# Altium PCB Panelized.PcbDoc
Units mil, origin at the board's own origin, x right, y up, seen from the top; angles counter-clockwise.
Board outline 1708.75 x 1945.38 mil, 4 copper layers (Top Layer, Mid Layer 1, Mid Layer 2, Bottom Layer), stack 61.811 mil thick; 79 components, 58 nets, 337 pads, 102 vias.
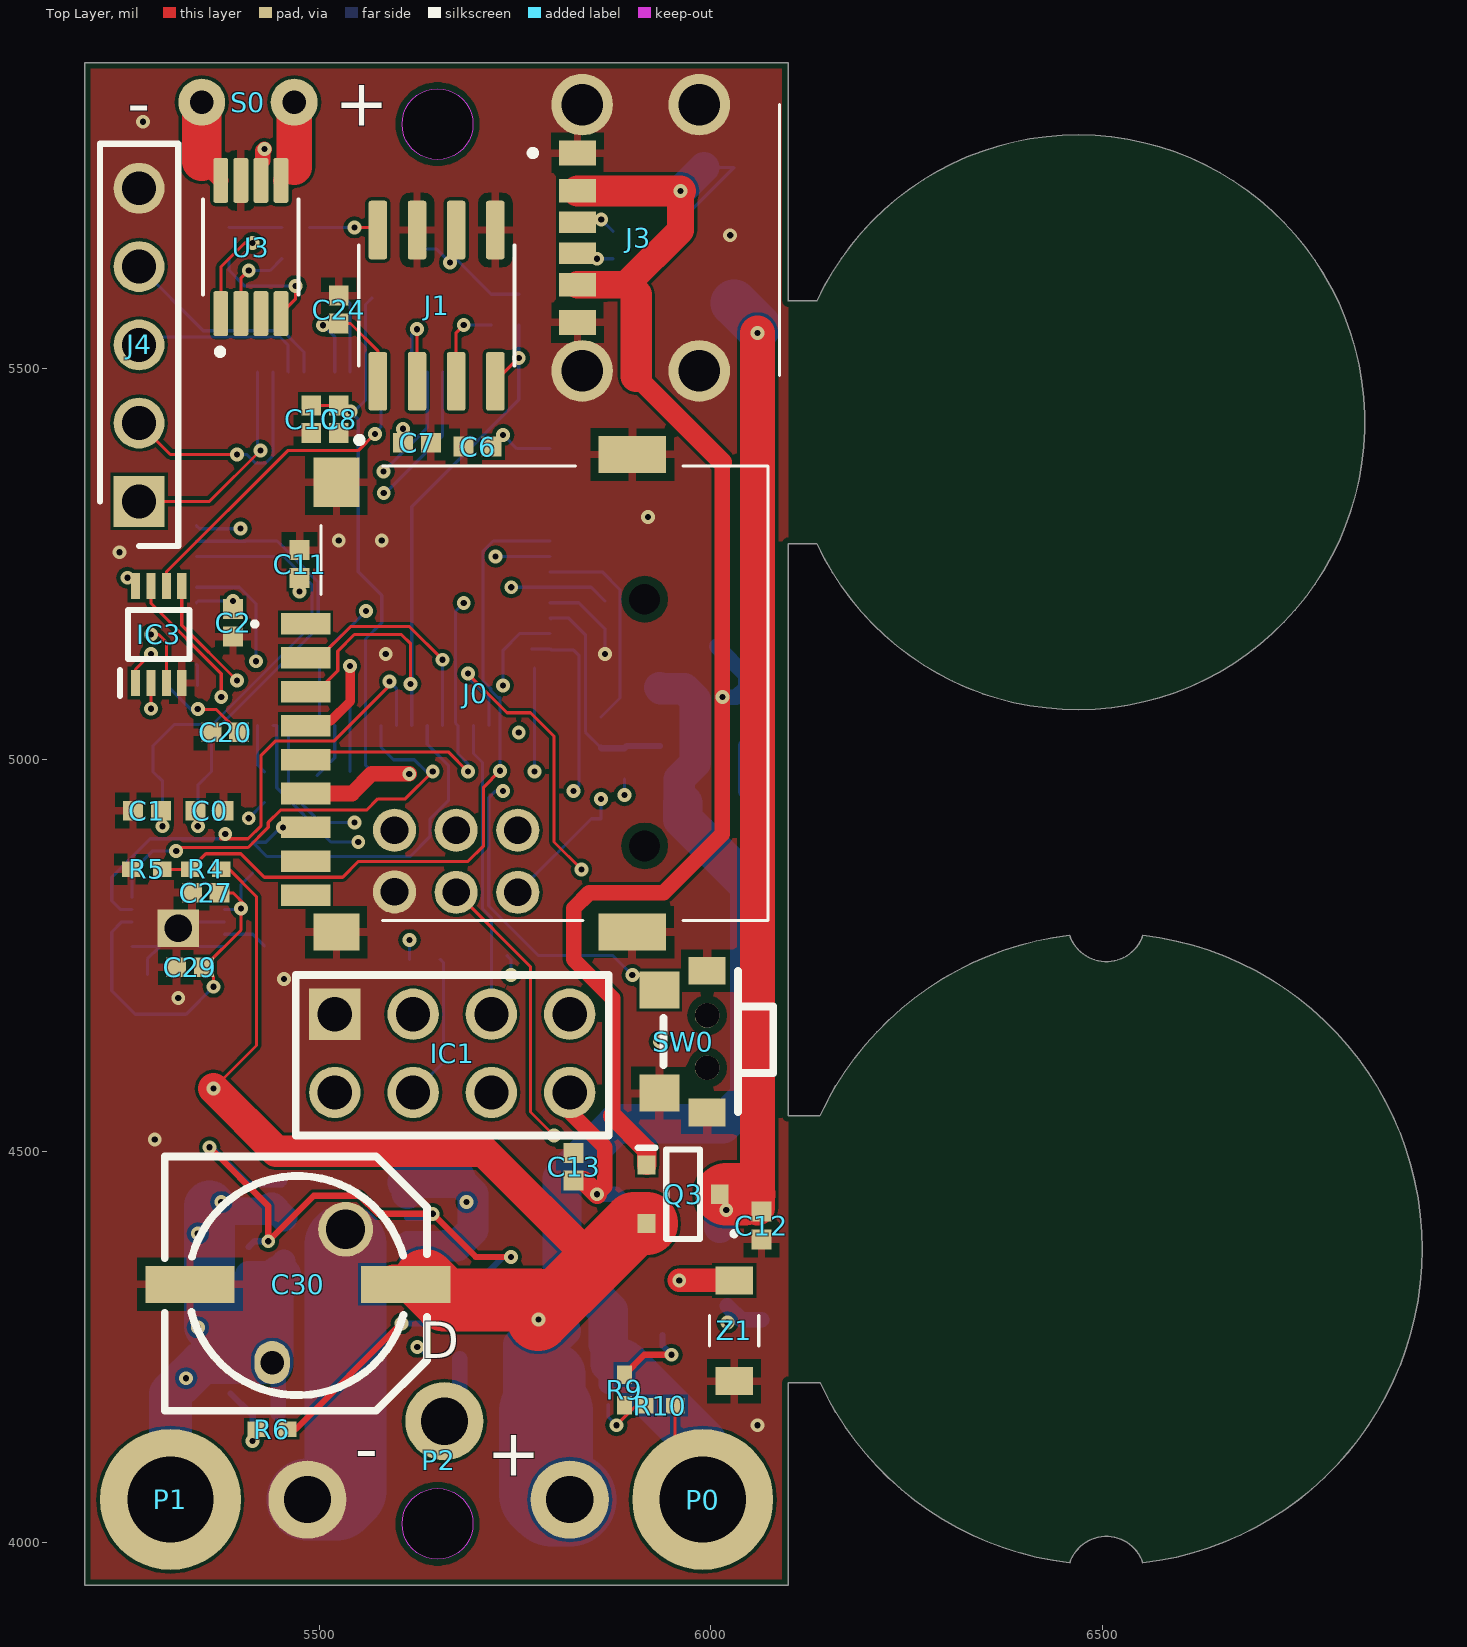
[diagram p0: Top Layer view]
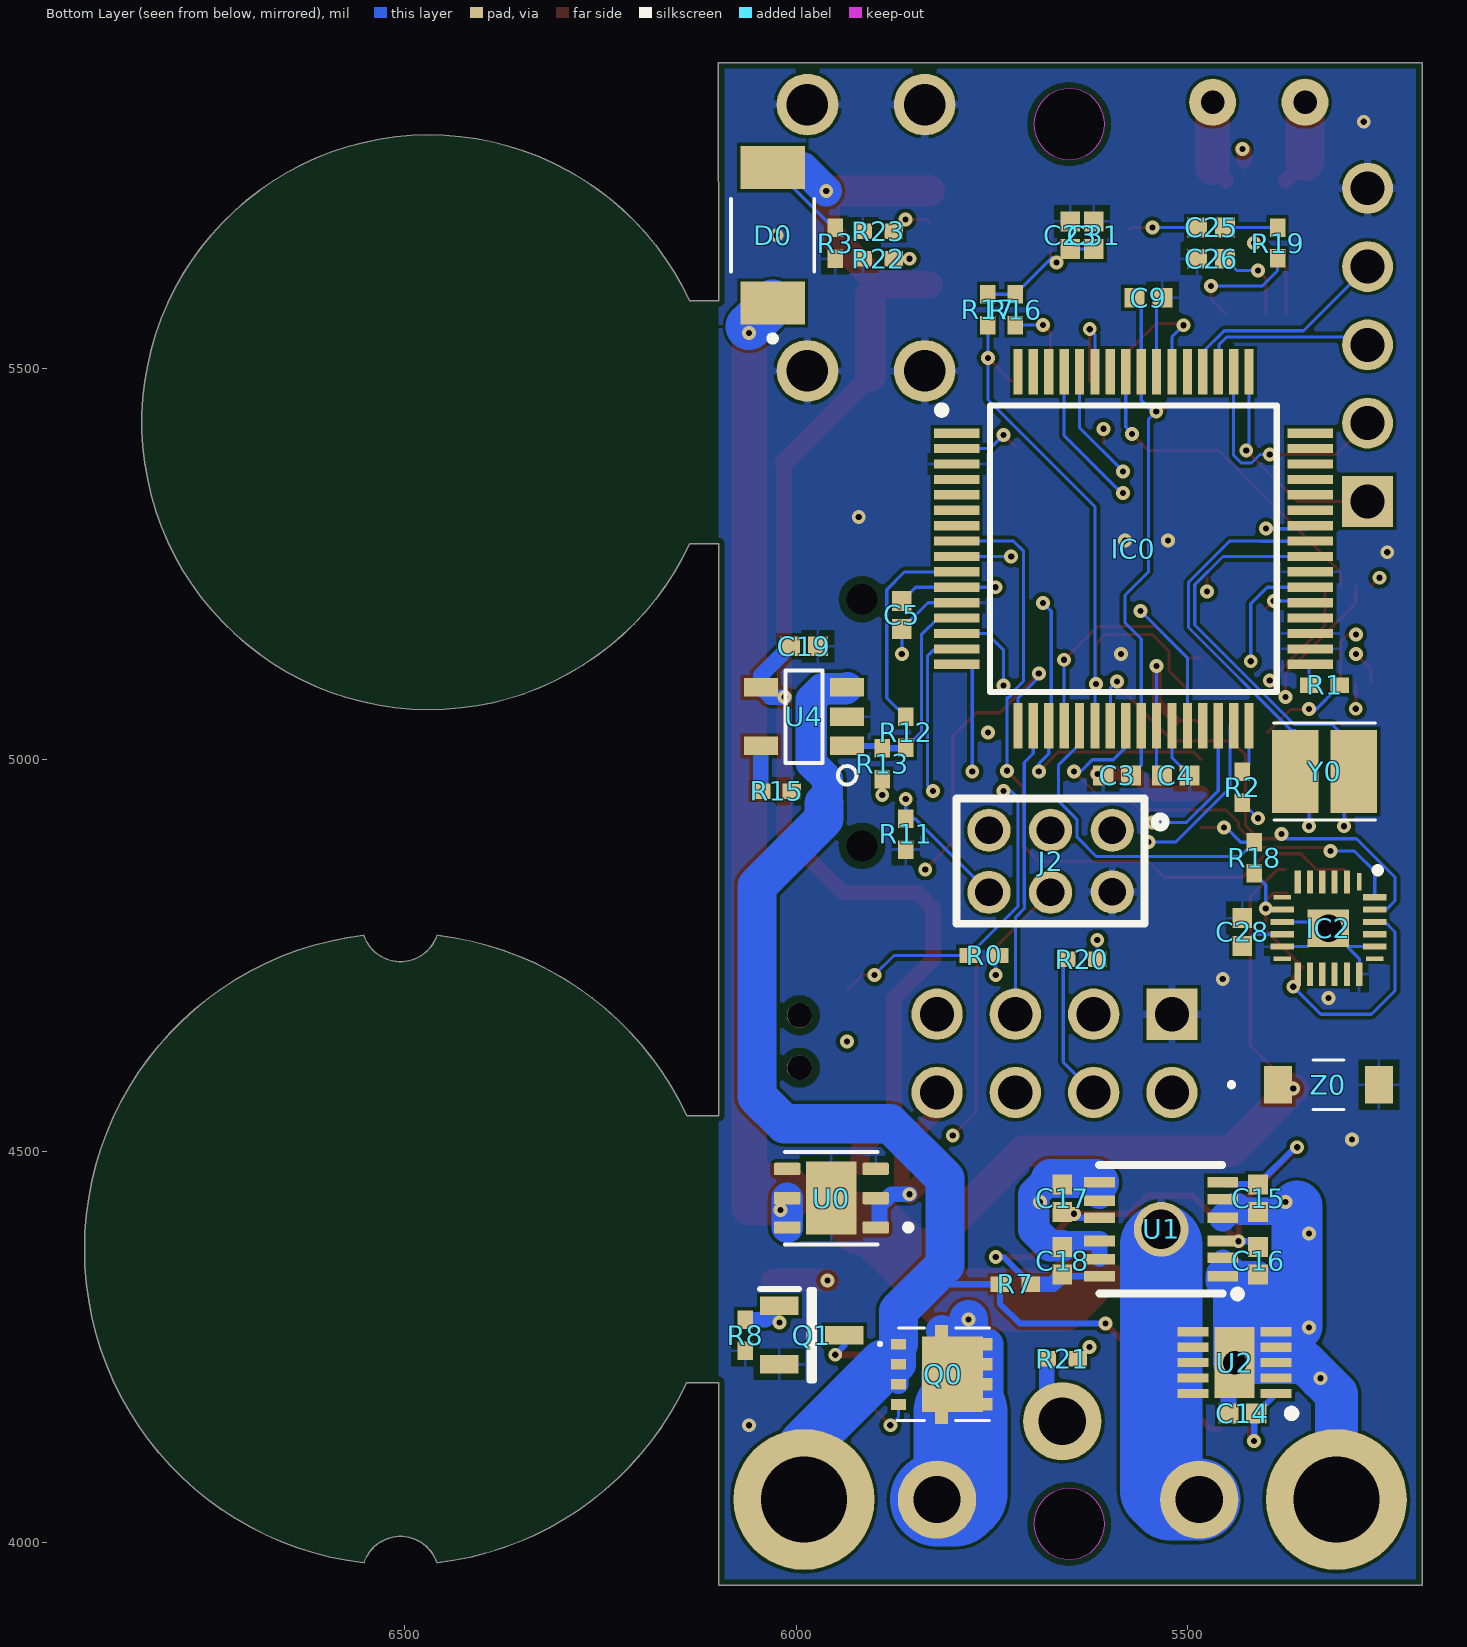
[diagram p1: Bottom Layer view, seen from below]
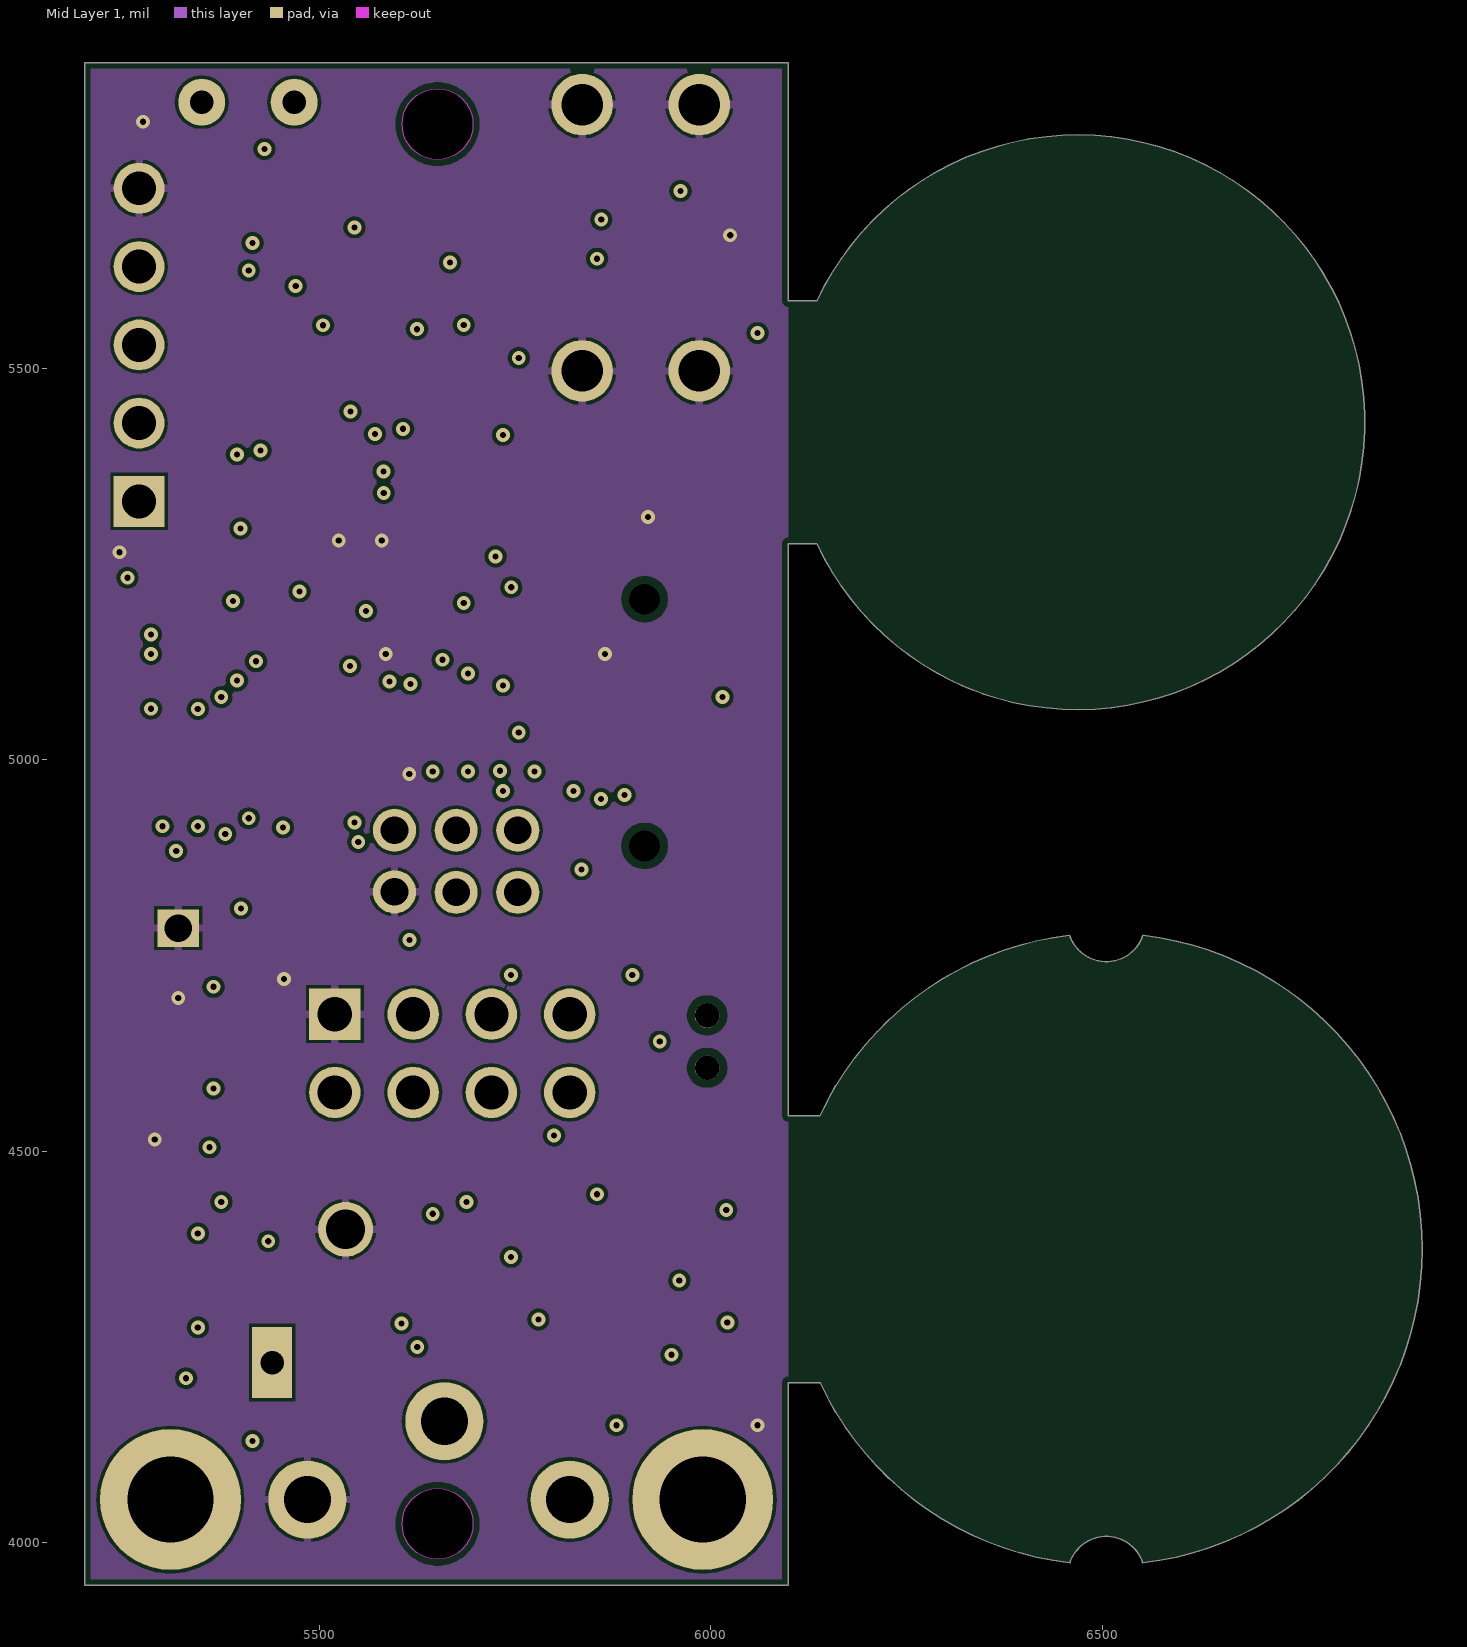
[diagram p2: Mid Layer 1]
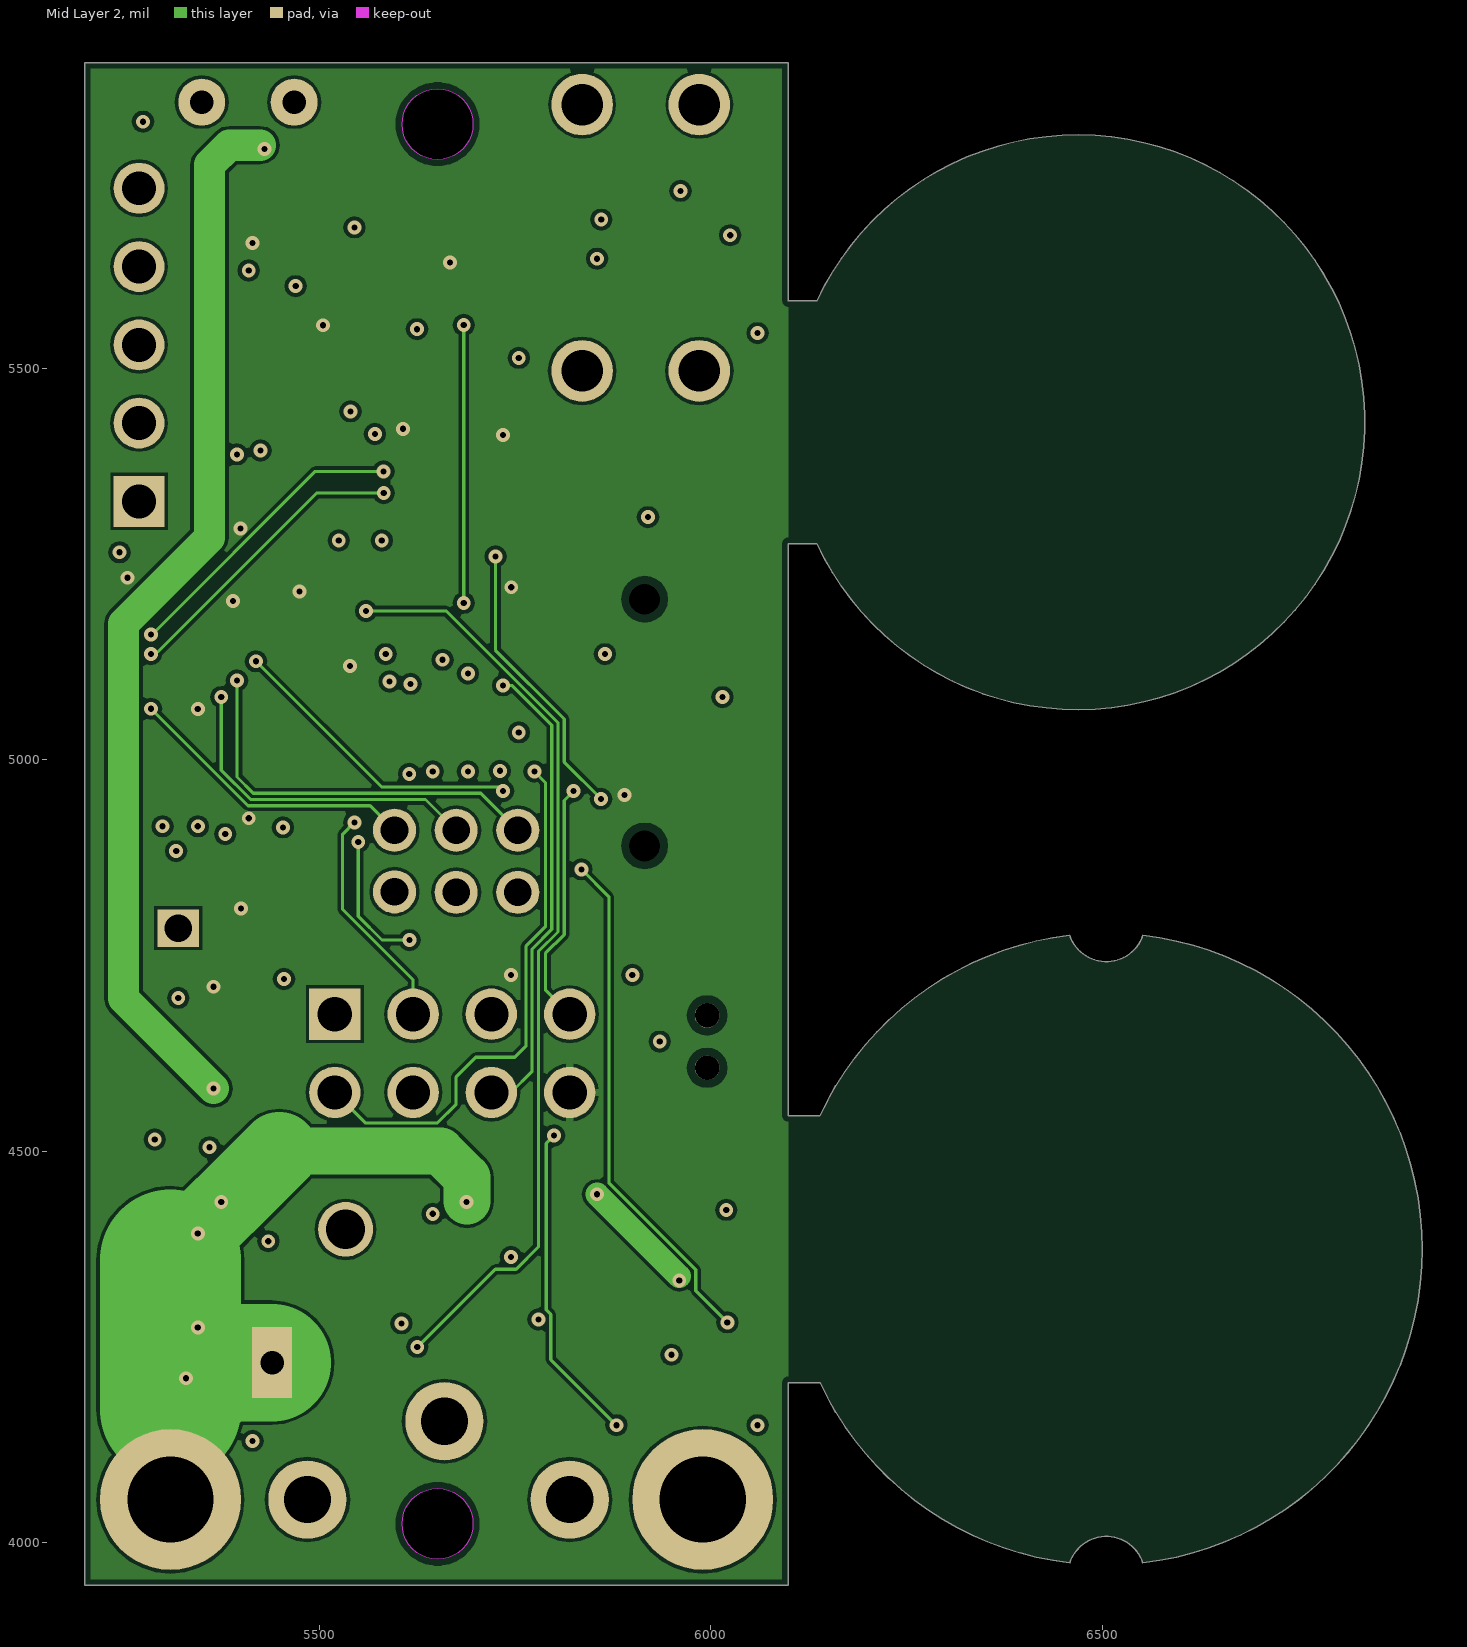
[diagram p3: Mid Layer 2]
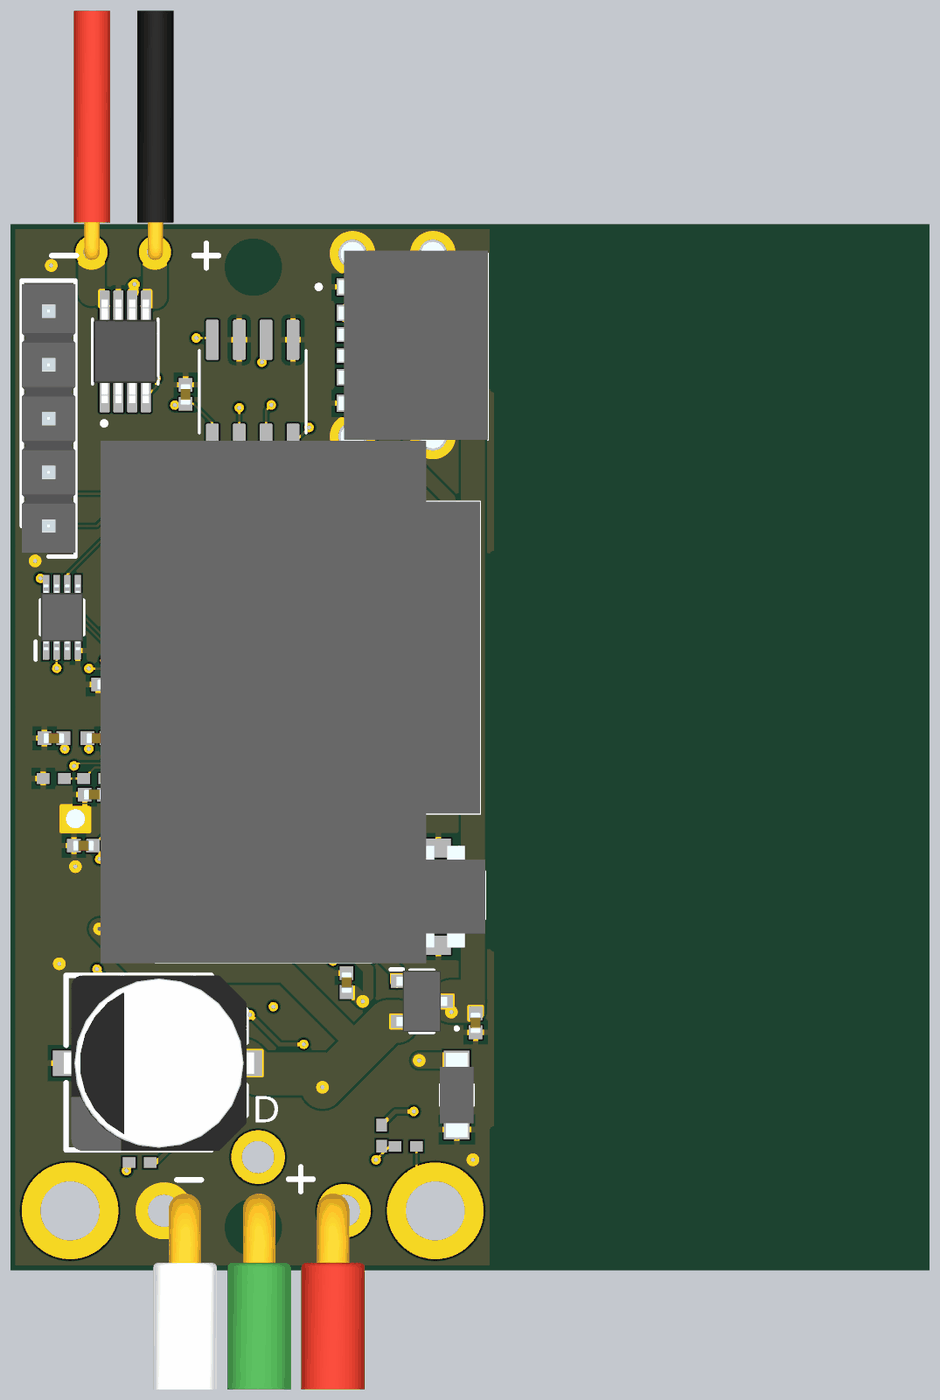
[diagram p4: 3D render of the assembled board from above, using the file's embedded part models]
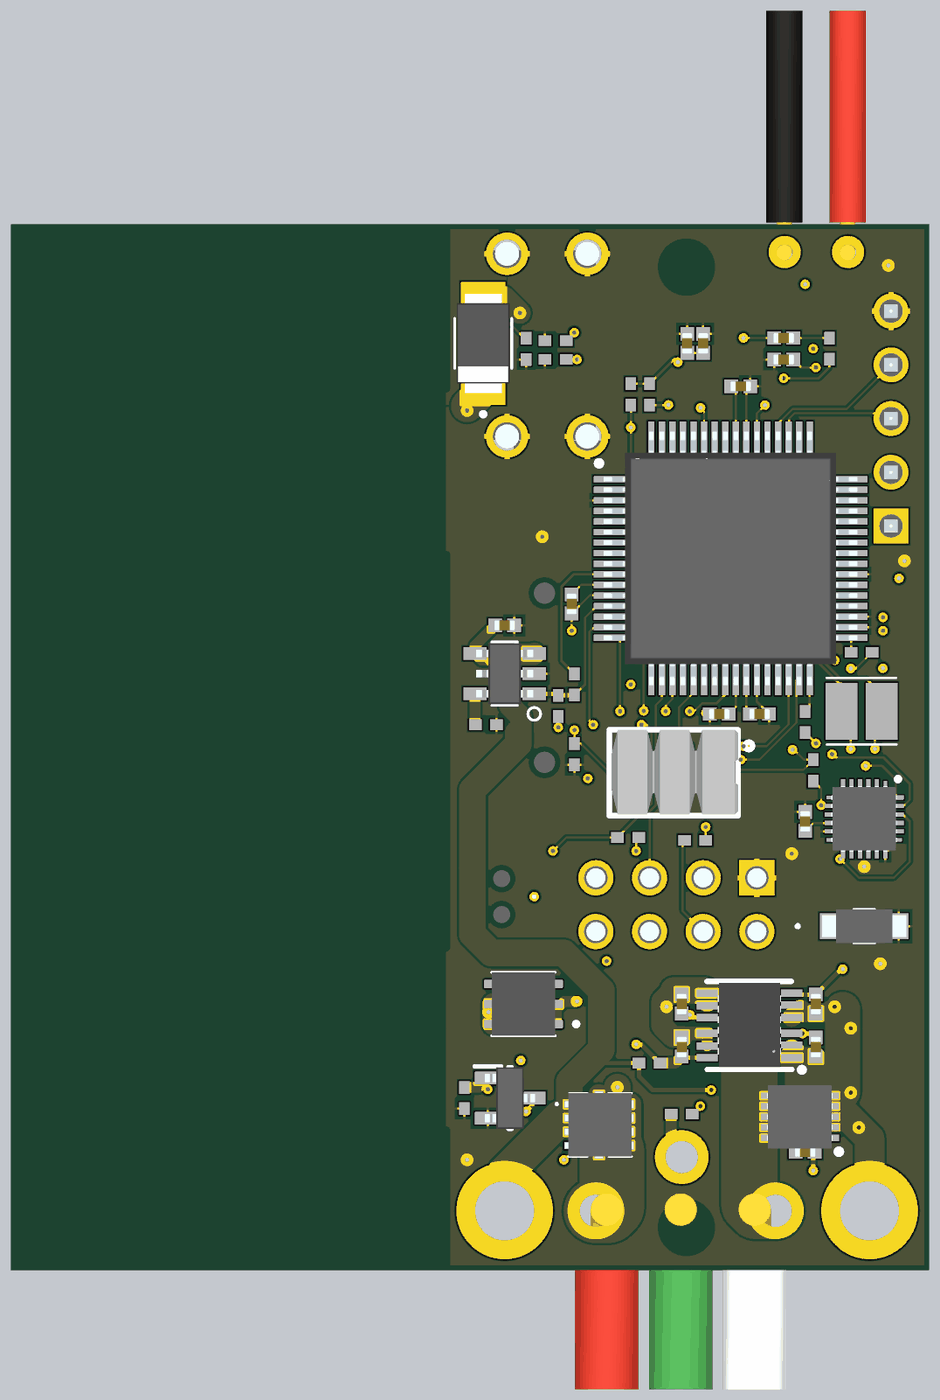
[diagram p5: 3D render of the assembled board from below, using the file's embedded part models]

## Layer stack, top to bottom
Top Solder: solder mask 0.5, Solder Resist, Dk 3.8
Top Layer: signal copper 1.378
Dielectric 1: prepreg 3.937, 2313, Dk 4.05
Mid Layer 1: signal copper 0.689
Core: core 49.8031, FR-4, Dk 4.5
Mid Layer 2: signal copper 0.689
Dielectric 2: prepreg 3.937, 2313, Dk 4.05
Bottom Layer: signal copper 1.378
Bottom Solder: solder mask 0.5, Solder Resist, Dk 3.8

## Board outline
6099.08,3945.25 6099.08,4204.42 6139.72,4204.42 ccw(c6505.45,4374.96) 6458.72,3974.13 cw(c6505.45,3958.7) 6552.18,3974.13 ccw(c6505.45,4374.96) 6552.18,4775.79 cw(c6505.45,4791.22) 6458.72,4775.79 ccw(c6505.45,4374.96) 6139.72,4545.51 6099.17,4545.51 6099.17,5275.91 6135.87,5275.91 ccw(c6468.6,5431.06) 6135.87,5586.22 6099.17,5586.22 6099.23,5890.63 6099.08,5890.63 5200.25,5890.63 5200.25,3945.25
cut-out: 5651.16,5766.61 cw(c5651.16,5811.89) 5605.89,5811.89 cw(c5651.16,5811.89) 5651.16,5857.16 cw(c5651.16,5811.89) 5696.44,5811.89 cw(c5651.16,5811.89)
cut-out: 5605.89,4023.99 cw(c5651.16,4023.99) 5651.16,4069.27 cw(c5651.16,4023.99) 5696.44,4023.99 cw(c5651.16,4023.99) 5651.16,3978.71 cw(c5651.16,4023.99)

## Design rules (kind name [scope] priority, off if disabled: settings)
BoardOutlineClearance [All] p1: gap=7.87 ignorepadtopadclearanceinfootprint=FALSE
Clearance [All] p1: gap=4 ignorepadtopadclearanceinfootprint=FALSE except(5: Arc-Via Track-Via SMDPad-Via THPad-Via Via-Via Via-Fill Via-Poly Via-Region Via-Text; 9.84: Arc-Hole Track-Hole SMDPad-Hole THPad-Hole Via-Hole Fill-Hole Poly-Hole Region-Hole Text-Hole)
ComponentClearance [All] p1: gap=4 collisioncheckmode=3 verticalgap=4 showdistances=TRUE
DiffPairsRouting [All] p1: maxlimit=4 minlimit=4 mostfreqgap=4 toplayer_minwidth=4 toplayer_maxwidth=71497.94 toplayer_prefwidth=4 midlayer1_minwidth=4 midlayer1_maxwidth=71497.94 midlayer1_prefwidth=4 midlayer2_minwidth=4 midlayer2_maxwidth=71497.94 midlayer2_prefwidth=4 bottomlayer_minwidth=4 bottomlayer_maxwidth=71497.94 bottomlayer_prefwidth=4 maxuncoupledlength=500
Height [All] p1: minheight=0 maxheight=71497.94 prefheight=500
HoleSize [All] p1: absolutevalues=TRUE maxlimit=248.03 minlimit=7.87 maxpercent=80.000 minpercent=20.000
HoleToHoleClearance [All] p1: gap=9.84 allowstackedmicrovias=FALSE
MinimumAnnularRing [All] p1: minimumring=3
MinimumSolderMaskSliver [All] p1: minsoldermaskwidth=0
PlaneClearance [All] p1: clearance=4
PlaneConnect PlaneConnectPowerPads [InPadClass('PowerPads')] p1: planeconnectstyle=Direct reliefexpansion=20 reliefentries=4 reliefconductorwidth=10 reliefairgap=10
PlaneConnect [All] p2: pad.planeconnectstyle=Relief pad.reliefexpansion=11.81 pad.reliefentries=4 pad.reliefconductorwidth=4 pad.reliefairgap=4 via.planeconnectstyle=Direct via.reliefexpansion=11.81 via.reliefentries=4 via.reliefconductorwidth=5 via.reliefairgap=5
PolygonConnect direct [All vs IsNamedPolygon('Top Layer-No Net1')] p1: thpad.connectstyle=Direct thpad.reliefconductorwidth=10 thpad.reliefentries=4 thpad.polygonreliefangle="90 Angle" thpad.airgapwidth=10 smdpad.connectstyle=Relief smdpad.reliefconductorwidth=10 smdpad.reliefentries=4 smdpad.polygonreliefangle="90 Angle" smdpad.airgapwidth=10 via.connectstyle=Direct via.reliefconductorwidth=10 via.reliefentries=4 via.polygonreliefangle="90 Angle" via.airgapwidth=10
PolygonConnect PolygonConnect_1 [All vs IsNamedPolygon('Top Layer-No Net1')] p2: thpad.connectstyle=Direct thpad.reliefconductorwidth=10 thpad.reliefentries=4 thpad.polygonreliefangle="90 Angle" thpad.airgapwidth=10 smdpad.connectstyle=Relief smdpad.reliefconductorwidth=10 smdpad.reliefentries=4 smdpad.polygonreliefangle="90 Angle" smdpad.airgapwidth=10 via.connectstyle=Direct via.reliefconductorwidth=10 via.reliefentries=4 via.polygonreliefangle="90 Angle" via.airgapwidth=10
PolygonConnect PolygonConnectPowerPads [All vs (InPadClass('PowerPads'))] p3: connectstyle=Direct reliefconductorwidth=10 reliefentries=4 polygonreliefangle="90 Angle" airgapwidth=10
PolygonConnect [All] p4: thpad.connectstyle=Relief thpad.reliefconductorwidth=10 thpad.reliefentries=4 thpad.polygonreliefangle="90 Angle" thpad.airgapwidth=4 smdpad.connectstyle=Relief smdpad.reliefconductorwidth=4 smdpad.reliefentries=4 smdpad.polygonreliefangle="90 Angle" smdpad.airgapwidth=8 via.connectstyle=Direct via.reliefconductorwidth=5 via.reliefentries=4 via.polygonreliefangle="90 Angle" via.airgapwidth=5
RoutingVias [All] p1: holewidth=7.87 width=17.72 viastyle="Through Hole" minholewidth=7.87 minwidth=17.72 maxholewidth=248.03 maxwidth=257.87
SilkToSilkClearance [All] p1: silktosilkclearance=0
SilkToSolderMaskClearance [IsPad] p1: minsilkscreentomaskgap=4 clearancetoexposedcopper=TRUE
SolderMaskExpansion [All] p1: expansion=2.95 istentingtop=FALSE
Width [All] p1: maxlimit=71497.94 minlimit=4 preferedwidth=4
20 further rules are at their usual default settings.

## Classes and differential pairs
component class Power: C12 C13 C14 C15 C16 C17 C18 C19 D0 J3 P0 P1 Q0 Q1 Q3 R3 R4 R5 R6 R7 R8 R9 R10 R11 R12 R13 R15 R22 R23 U0 U1 U2 U4 Z0 Z1
component class Peripherals: C20 C23 C24 C25 C26 C27 C28 C29 C30 IC1 IC2 IC3 J0 J1 J2 P2 R16 R17 R18 R19 R20 R21 S0 U3
component class Microcontroller: C0 C1 C2 C3 C4 C5 C6 C7 C8 C9 C10 C11 C31 IC0 J4 R0 R1 R2 SW0 Y0

## Components (designator, comment, footprint, x,y, rotation, side; value= is the part's Value field where it differs from the comment)
C0 "10pF 0402" CAPC1005X56N 5360,4935 r0 top
C1 "10pF 0402" CAPC1005X56N 5280,4935 r0 top
C2 "0.1uF 0402" CAPC1005X56N 5390,5175 r270 top
C3 "0.1uF 0402" CAPC1005X56N 5590,4980 r0 bottom
C4 "0.1uF 0402" CAPC1005X56N 5515,4980 r180 bottom
C5 "0.1uF 0402" CAPC1005X56N 5865,5185 r270 bottom
C6 "0.1uF 0402" CAPC1005X56N 5702.28,5400 r180 top
C7 "0.1uF 0402" CAPC1005X56N 5625,5405 r0 top
C8 "2.2uF 0402" CAPC1005X56N 5525,5435 r90 top
C9 "1uF 0402" CAPC1005X56N 5550,5590 r0 bottom
C10 "0.1uF 0402" CAPC1005X56N 5490,5435 r90 top
C11 "10uF 0402, Place in center of TM4C" CAPC1005X56N 5475,5250 r90 top
C12 "10uF 0402" CAPC1005X56N 6065,4405 r90 top
C13 "10uF 0402" CAPC1005X56N 5825,4480 r270 top
C14 "0.1uF 0402" CAPC1005X56N 5430,4165 r0 bottom
C15 "0.1uF 0402" CAPC1005X56N 5410,4440 r90 bottom
C16 "0.1uF 0402" CAPC1005X56N 5410,4360 r270 bottom
C17 "0.1uF 0402" CAPC1005X56N 5660,4440 r270 bottom
C18 "0.1uF 0402" CAPC1005X56N 5660,4360 r270 bottom
C19 "10uF 0402" CAPC1005X56N 5990,5145 r180 bottom
C20 "10uF 0402" CAPC1005X56N 5380,5035 r0 top
C23 "0.1uF 0402" CAPC1005X56N 5650,5670 r90 bottom
C24 "10uF 0402" CAPC1005X56N 5525,5575 r90 top
C25 "68nF 0402" CAPC1005X56N 5470,5680 r0 bottom
C26 "1uF 0402" CAPC1005X56N 5470,5640 r0 bottom
C27 "0.1uF 0402" CAPC1005X56N 5355,4830 r180 top
C28 "0.1uF 0402" CAPC1005X56N 5430,4780 r90 bottom
C29 "0.1uF 0402" CAPC1005X56N 5335,4735 r180 top
C30 "1000uF" "8x10.2mm Radial Capacitor" 5475.54,4330.02 r180 top
C31 "0.1uF 0402" CAPC1005X56N 5620,5670 r90 bottom
D0 "PMEG3050EP,115" SOD128 6030,5670 r90 bottom
IC0 "TM4C123GH6PMI7" QFP50P1200X1200X160-64N 5569.09,5269.53 r180 bottom
IC1 "ESP-01S" ESP-01 5520,4675 r0 top
IC2 "MPU-6500" QFN-24 5320,4785 r270 bottom
IC3 "SN74LVC3G17DCUR" SOP50P310X90-8N 5295,5160 r90 top
J0 "TF_PUSH" TFPUSH 5787.8,5084.88 r90 top
J1 "MCP4821-E/SN" SOIC127P600X175-8N 5650,5580 r90 top
J2 "PZ200V-12-06P" "2mm 2x3 Header TH" 5175,4370.63 r0 bottom
J3 "TYPE-C-31-M-17" TYPEC31M17 5928.43,5666.73 r90 top
J4 "0.1\" 1x5 Pins" HDRV5W64P0X254_1X5_1270X254X610P 5270,5330 r90 top
P0 "21700 Battery Pad" "21700 Battery Pad" 5990,4055 r0 top
P1 "21700 Battery Pad" "21700 Battery Pad" 5310,4055 r0 top
P2 "Neopixel" "Neopixel Pads" 5660,4055 r180 top
Q0 "AONR21357" AONR21357 5812.2,4215 r270 bottom
Q1 "L2N7002SWT1G" SC-70 5980,4265 r180 bottom
Q3 "SSM3J328R,LF" SOT-23F 5965,4445 r0 top
R0 "10kΩ, 0402" 0402 5760,4750 r180 bottom
R1 "10kΩ, 0402" 0402 5325,5095 r180 bottom
R2 "10kΩ, 0402" 0402 5430,4965 r270 bottom
R3 "10kΩ, 0402" 0402 5950,5659.69 r270 bottom
R4 "10kΩ, 0402" 0402 5355,4860 r180 top
R5 "10kΩ, 0402" 0402 5279.69,4860 r180 top
R6 "470Ω, 0402" 0402 5439.69,4145 r0 top
R7 "100Ω, 0402" 0402 5720,4330 r180 bottom
R8 "10kΩ, 0402" 0402 6065,4265 r90 bottom
R9 "1kΩ, 0402" 0402 5890,4195 r270 top
R10 "10kΩ, 0402" 0402 5935,4175 r0 top
R11 "1kΩ, 0402" 0402 5860,4905 r90 bottom
R12 "2kΩ, 0402" 0402 5860,5035 r90 bottom
R13 "800kΩ, 0402" 0402 5890,4995 r270 bottom
R15 "1.25kΩ, 0402" 0402 6025,4960 r180 bottom
R16 "10kΩ, 0402" 0402 5720,5575 r90 bottom
R17 "10kΩ, 0402" 0402 5755,5575 r90 bottom
R18 "10kΩ, 0402" 0402 5415,4875 r270 bottom
R19 "475kΩ, 0402" 0402 5385,5660 r270 bottom
R20 "10kΩ, 0402" 0402 5635,4745 r0 bottom
R21 "470Ω, 0402" 0402 5660,4235 r180 bottom
R22 "1kΩ, 0402" 0402 5895,5640 r0 bottom
R23 "1kΩ, 0402" 0402 5895,5675 r180 bottom
S0 "Speaker" "SPEAKER PADS" 5350,5840 r0 top
SW0 "TS24CA" TS24CA 6000,4640 r0 top
U0 "LD39200PU33R" SON95P300X300X100-7N 5955,4440 r0 bottom
U1 "XB9241A" DFN4x4x0.55-12FC 5533.83,4400.94 r0 bottom
U2 "XB6206AE" DFN3X3-10 5440,4230 r0 bottom
U3 "LY8006ULT" MSOP-8 5412.8,5654.96 r90 top
U4 "BL4054B-42TPTRN" TSOT23-5 5990,5055 r90 bottom
Y0 "NX3225GB-16M-STD-CRA-2" NX3225GD-STD-CRA-3 5325,4985 r180 bottom
Z0 "BZT52C4V7" SOD-123 5320,4585 r180 bottom
Z1 "MM1W3V3" SOD-123 6030,4270.63 r270 top

## Footprints (in the part's own frame and the unit in brackets; to place one, negate y for a bottom-side part, rotate by r counter-clockwise, add the part's x,y. Pads: shape width x height; smd on the part's side, far side on the other; paste and mask are expansions set on the pad)
"2mm 2x3 Header TH" [mm]
  round 1.4 hole 0.9: 1(10.7,-13.7) 2(12.7,-13.7) 3(14.7,-13.7) 4(14.7,-11.684) 5(12.7,-11.684) 6(10.7,-11.7)
  silkscreen extent 8.97,-14.73 15.75,-10.67, body extent 9.65,-14.73 15.65,-10.73, height 5.52
"8x10.2mm Radial Capacitor" [mil]
  rect 114.2x47.2 smd: 1(-135.06,0.02) 2(140.54,0.02)
  silkscreen extent -162,-163 173,162, body extent -177,-163 177,163, height 244
0402 [mm] "Chip Capacitor, Body 1.0x0.5mm, IPC High Density"
  rect 0.6x0.5 smd: 1(-0.5,0) 2(0.5,0)
  body extent -0.55,-0.3 0.55,0.3, height 1.3
"21700 Battery Pad" [mil]
  round 180 hole 110: 1(0,0)
AONR21357 [mm]
  rect 0.35x0.5 smd: 1(-0.975,-1.45) 2(-0.325,-1.45) 3(0.325,-1.45) 4(0.975,-1.45)
  rect 0.4x0.3 smd: 5(0.975,1.45) 6(0.325,1.45) 7(-0.325,1.45) 8(-0.975,1.45)
  rect 2.45x1.98 smd: 9(0,0.31)
  rect 0.38x0.43 smd: 10(-1.415,-0.05) 11(1.415,-0.05)
  silkscreen extent -1.5,-2.1 1.5,1.5, body extent -1.57,-1.66 1.57,1.57, height 1
CAPC1005X56N [mm]
  rect 0.65x0.64 smd: 1(-0.45,0) 2(0.45,0)
  body extent -0.5,-0.25 0.5,0.25, height 0.56
DFN3X3-10 [mm]
  rect 1x0.3 smd: 1(-1.35,1) 2(-1.35,0.5) 3(-1.35,0) 4(-1.35,-0.5) 5(-1.35,-1) 6(1.35,-1) 7(1.35,-0.5) 8(1.35,0) 9(1.35,0.5) 10(1.35,1)
  rect 1.3x2.3 / inner rect 1.3x2.3 / far side oval 1.143x1.397 hole 0.762: EPAD(0,0)
  silkscreen extent -1.97,1.53 -1.72,1.77, body extent -1.55,-1.5 1.55,1.5, height 0.8
DFN4x4x0.55-12FC [mm]
  rect 1x0.35 smd: 1(-2.002,1.543) 2(-2.002,0.943) 3(-2.002,0.393) 4(-2.002,-0.357) 5(-2.002,-0.957) 6(-2.002,-1.507) 7(1.998,-1.507) 8(1.998,-0.907) 9(1.998,-0.357) 10(1.998,0.393) 11(1.998,0.993) 12(1.998,1.543)
  round 1.778 hole 1.27: EPAD(-0.002,0.018)
  silkscreen extent -2.59,-2.06 2.01,2.23, body extent -1.5,-1.99 3.68,1.99, height 0.99
ESP-01 [mm]
  rect 1.665x1.665 hole 1.11: 1(0,0)
  round 1.665 hole 1.11: 2(2.54,0) 3(5.08,0) 4(7.62,0) 5(0,-2.54) 6(2.54,-2.54) 7(5.08,-2.54) 8(7.62,-2.54)
  silkscreen extent -1.27,-3.94 8.89,1.27, body extent -3.89,-4.04 11.51,20.66, height 5.66
HDRV5W64P0X254_1X5_1270X254X610P [mm]
  rect 1.65x1.65 hole 1.1: 1(0,0)
  round 1.65 hole 1.1: 2(2.54,0) 3(5.08,0) 4(7.62,0) 5(10.16,0)
  silkscreen extent -1.45,-1.27 11.61,1.27, body extent -1.27,-1.27 11.43,1.27, height 6.1
MSOP-8 [mm]
  rrect25% 1.45x0.48 smd: 1(-2.16,0.975) 2(-2.16,0.325) 3(-2.16,-0.325) 4(-2.16,-0.975) 5(2.16,-0.975) 6(2.16,-0.325) 7(2.16,0.325) 8(2.16,0.975)
  silkscreen extent -3.5,-1.55 1.55,1.55, body extent -2.45,-1.5 2.45,1.5, height 1.03
"Neopixel Pads" [mm]
  round 2.54 hole 1.53: +(-4.064,0) -(4.445,0) D(0,-2.54)
  body extent -5.04,-0.82 4.95,8.44, height 3
NX3225GD-STD-CRA-3 [mm]
  rect 1.5x2.7 smd: 1(-0.95,0) 2(0.95,0)
  silkscreen extent -1.65,-1.57 1.66,1.58
QFN-24 [mm]
  rect 0.559x0.152 smd: 1(-1.5,1)
  rect 0.75x0.2 smd: 2(-1.5,0.6) 3(-1.5,0.2) 4(-1.5,-0.2) 5(-1.5,-0.6) 6(-1.5,-1) 13(1.5,-1) 14(1.5,-0.6) 15(1.5,-0.2) 16(1.5,0.2) 17(1.5,0.6) 18(1.5,1)
  rect 0.152x0.559 smd: 7(-1,-1.5) 12(1,-1.5) 19(1,1.5)
  rect 0.2x0.75 smd: 8(-0.6,-1.5) 9(-0.2,-1.5) 10(0.2,-1.5) 11(0.6,-1.5) 20(0.6,1.5) 21(0.2,1.5) 22(-0.2,1.5) 23(-0.6,1.5) 24(-1,1.5)
  rect 1.219x1.346 hole 0.889: 25(0,0)
  silkscreen extent -1.97,1.5 -1.78,1.7, body extent -1.55,-1.55 1.55,1.55, height 0.95
QFP50P1200X1200X160-64N [mm]
  rect 1.475x0.3 smd: 1(-5.738,3.75) 2(-5.738,3.25) 3(-5.738,2.75) 4(-5.738,2.25) 5(-5.738,1.75) 6(-5.738,1.25) 7(-5.738,0.75) 8(-5.738,0.25) 9(-5.738,-0.25) 10(-5.738,-0.75) 11(-5.738,-1.25) 12(-5.738,-1.75) 13(-5.738,-2.25) 14(-5.738,-2.75) 15(-5.738,-3.25) 16(-5.738,-3.75) 33(5.738,-3.75) 34(5.738,-3.25) 35(5.738,-2.75) 36(5.738,-2.25) 37(5.738,-1.75) 38(5.738,-1.25) 39(5.738,-0.75) 40(5.738,-0.25) 41(5.738,0.25) 42(5.738,0.75) 43(5.738,1.25) 44(5.738,1.75) 45(5.738,2.25) 46(5.738,2.75) 47(5.738,3.25) 48(5.738,3.75)
  rect 0.3x1.475 smd: 17(-3.75,-5.738) 18(-3.25,-5.738) 19(-2.75,-5.738) 20(-2.25,-5.738) 21(-1.75,-5.738) 22(-1.25,-5.738) 23(-0.75,-5.738) 24(-0.25,-5.738) 25(0.25,-5.738) 26(0.75,-5.738) 27(1.25,-5.738) 28(1.75,-5.738) 29(2.25,-5.738) 30(2.75,-5.738) 31(3.25,-5.738) 32(3.75,-5.738) 49(3.75,5.738) 50(3.25,5.738) 51(2.75,5.738) 52(2.25,5.738) 53(1.75,5.738) 54(1.25,5.738) 55(0.75,5.738) 56(0.25,5.738) 57(-0.25,5.738) 58(-0.75,5.738) 59(-1.25,5.738) 60(-1.75,5.738) 61(-2.25,5.738) 62(-2.75,5.738) 63(-3.25,5.738) 64(-3.75,5.738)
  silkscreen extent -6.35,-4.65 4.65,4.65, body extent -6,-6 6,6, height 1.6
SC-70 [mm]
  rect 1.25x0.6 smd: 1(-1.05,0.95) 2(-1.05,-0.95) 3(1.05,0)
  silkscreen extent -1.68,-1.46 0.08,1.5, body extent -1.18,-1.46 1.19,1.46, height 1.12
SOD128 [mm]
  rect 1.4x2.1 smd paste-2: 1(-2.2,0) 2(2.2,0)
  silkscreen extent -3.45,-1.35 1.18,1.35, body extent -2.35,-1.25 2.35,1.25, height 1.1
SOD-123 [mm]
  rect 0.91x1.22 smd: 1(-1.635,0) 2(1.635,0)
  silkscreen extent -3.2,-0.8 0.5,0.8, body extent -2,-0.8 2,0.8, height 1.4
SOIC127P600X175-8N [mm]
  rrect25% 1.9x0.6 smd: 1(-2.455,1.905) 2(-2.455,0.635) 3(-2.455,-0.635) 4(-2.455,-1.905) 5(2.455,-1.905) 6(2.455,-0.635) 7(2.455,0.635) 8(2.455,1.905)
  silkscreen extent -4.45,-2.52 1.95,2.6
SON95P300X300X100-7N [mm]
  rrect25% 0.86x0.4 smd: 1(-1.435,0.95) 2(-1.435,0) 3(-1.435,-0.95) 4(1.435,-0.95) 5(1.435,0) 6(1.435,0.95)
  rect 1.63x2.37 smd paste-2: 7(0,0)
  silkscreen extent -2.59,-1.5 1.5,1.5, body extent -1.5,-1.5 1.5,1.5, height 0.54
SOP50P310X90-8N [mm]
  rect 0.85x0.3 smd: 1(-1.575,0.75) 2(-1.575,0.25) 3(-1.575,-0.25) 4(-1.575,-0.75) 5(1.575,-0.75) 6(1.575,-0.25) 7(1.575,0.25) 8(1.575,0.75)
  silkscreen extent -2,-1 0.8,1.25, body extent -1.55,-1 1.55,1, height 0.9
SOT-23F [mm]
  rect 0.575x0.62 smd: 1(-1.188,0.95) 2(-1.188,-0.95) 3(1.188,0)
  silkscreen extent -1.48,-1.45 0.55,1.51, body extent -1.2,-1.45 1.2,1.45, height 0.88
"SPEAKER PADS" [mil]
  round 60 hole 30: +(118.11,0) -(0,0)
  body extent -32,-15 152,449, height 77
TFPUSH [mm]
  rect 0.7x1.6 smd: 1(2.25,7.75) 2(1.15,7.75) 3(0.05,7.75) 4(-1.05,7.75) 5(-2.15,7.75) 6(-3.25,7.75) 7(-4.35,7.75) 8(-5.45,7.75) CD1(-6.55,7.75)
  rect 1.6x1.5 smd: G1(6.85,6.75)
  rect 1.2x1.5 smd: G2(-7.75,6.75)
  rect 1.2x2.2 smd: G3(-7.75,-2.85) G4(7.75,-2.85)
  round 0.5 hole 1 unplated: MH1(3.05,-3.25) MH2(-4.95,-3.25)
  silkscreen extent -7.37,-7.25 7.37,9.45, body extent -8.23,-7.25 8.23,8.48, height 2.1
TS24CA [mm]
  rect 1.2x0.9 smd: 1(-0.114,2.3) 2(-0.114,-2.3)
  rect 1.3x1.2 smd: 3(-1.664,1.675) 4(-1.664,-1.675)
  round 0.8 hole 0.8 unplated paste+0 mask+0.102: ""(-0.114,-0.85) ""(-0.114,0.85)
  silkscreen extent -1.52,-2.29 2.03,2.29, body extent -1.9,-2.39 2.1,2.39, height 1.45
TSOT23-5 [mm]
  rect 0.6x1.1 smd: 1(-0.95,-1.4) 2(0,-1.4) 3(0.95,-1.4) 4(0.95,1.4) 5(-0.95,1.4)
  silkscreen extent -2.2,-1.7 1.5,0.6, body extent -1.45,-1.35 1.45,1.35, height 1.45
TYPEC31M17 [mm]
  rect 0.7x1.2 smd: A5(-0.5,2.5) B5(0.5,2.5)
  rect 0.76x1.2 smd: A9(1.52,2.5) B9(-1.52,2.5)
  rect 0.8x1.2 smd: A12(2.75,2.5) B12(-2.75,2.5)
  round 2 hole 1.346: MH1(-4.32,-1.45) MH2(4.32,-1.45) MH3(4.32,2.35) MH4(-4.32,2.35)
  silkscreen extent -4.47,-4.05 4.32,4.05, body extent -4.89,-4.05 4.89,3.03, height 3.36

## Part data
C0 C1 C2 C3 C4 C5 C6 C7 C8 C9 C10 C11 C12 C13 C14 C15 C16 C17 C18 C19 C20 C23 C24 C25 C26 C27 C28 C29 C31: library part 04025A100BAT2A, "Capacitor", Manufacturer_Name=AVX, Mouser Part Number=581-04025A100B, Arrow Part Number=04025A100BAT2A, Arrow Price/Stock=https://www.arrow.com/en/products/04025a100bat2a/avx, Datasheet Link=http://www.mouser.com/catalog/supplier/library/pdf/AVXSurfaceMountCeramic.pdf, Height=0.56mm, Manufacturer_Part_Number=04025A100BAT2A, Mouser Price/Stock=https://www.mouser.com/Search/Refine.aspx?Keyword=581-04025A100B
C30: library part "8x10.2mm Radial Capacitor", "Capacitor Polarised", Manufacturer_Name="Cinch Connectivity Solutions", Manufacturer_Part_Number=107CKS035M, Datasheet Link=http://www.farnell.com/datasheets/1912641.pdf, Height=12.5mm
D0: "Schottky Diode", Manufacturer_Name=Nexperia, Mouser Part Number=771-PMEG3050EP115, Arrow Part Number=PMEG3050EP,115, Arrow Price/Stock=https://www.arrow.com/en/products/pmeg3050ep115/nexperia, Datasheet Link=https://docs-emea.rs-online.com/webdocs/14cd/0900766b814cd012.pdf, Height=1mm, Manufacturer_Part_Number=PMEG3050EP,115, Mouser Price/Stock=https://www.mouser.co.uk/ProductDetail/Nexperia/PMEG3050EP115?qs=GcY6OjH1zdmnjQ%2FhUT5aOA%3D%3D
IC0: "Integrated Circuit", Manufacturer_Name="Texas Instruments", Mouser Part Number=595-TM4C123GH6PMI7, Arrow Part Number=TM4C123GH6PMI7, Arrow Price/Stock=https://www.arrow.com/en/products/tm4c123gh6pmi7/texas-instruments, Datasheet Link=http://www.ti.com/lit/gpn/tm4c123gh6pm, Height=1.6mm, Manufacturer_Part_Number=TM4C123GH6PMI7, Mouser Price/Stock=https://www.mouser.co.uk/ProductDetail/Texas-Instruments/TM4C123GH6PMI7?qs=m%2F7bTylgptcEEuXHNU46tA%3D%3D
IC1: "Integrated Circuit", Manufacturer_Name=Ai-Thinker, Manufacturer_Part_Number=ESP-01, Datasheet Link=http://wiki.ai-thinker.com/_media/esp8266/esp8266_series_modules_user_manual_v1.1.pdf, Height=2mm
IC2: "Integrated Circuit", Manufacturer_Name=TDK, Mouser Part Number=410-MPU-6500, Arrow Part Number=MPU-6500, Arrow Price/Stock=https://www.arrow.com/en/products/mpu-6500/invensense, Datasheet Link=https://www.invensense.com/wp-content/uploads/2015/02/MPU-6500-Datasheet2.pdf, Height=0.95mm, Manufacturer_Part_Number=MPU-6500
IC3: "Integrated Circuit", Manufacturer_Name="Texas Instruments", Mouser Part Number=595-SN74LVC3G17DCUR, Arrow Part Number=SN74LVC3G17DCUR, Arrow Price/Stock=https://www.arrow.com/en/products/sn74lvc3g17dcur/texas-instruments, Datasheet Link=http://www.ti.com/lit/ds/symlink/sn74lvc3g17.pdf, Height=0.9mm, Manufacturer_Part_Number=SN74LVC3G17DCUR, Mouser Price/Stock=https://www.mouser.co.uk/ProductDetail/Texas-Instruments/SN74LVC3G17DCUR?qs=0smPjiIwnfJ%2FZmnYCRa%2FdA%3D%3D
J0: "Connector", Manufacturer_Name="Shou Han", Manufacturer_Part_Number="TF PUSH", Datasheet Link=https://datasheet.lcsc.com/szlcsc/1912111437_SHOU-HAN-TF-PUSH_C393941.pdf, Height=2mm
J1: Package=None, Availability=Unavailable, MF="{'manufacturer': u'Microchip'}", MP=MCP4821-E/SN, Price=None
J2: "Connector", Arrow Part Number=54202-G08-03, Manufacturer_Name=Amphenol, Mouser Part Number=649-54202-G08-03, Arrow Price/Stock=https://www.arrow.com/en/products/54202-g08-03/amphenol-fci, Datasheet Link=https://cdn.amphenol-icc.com/media/wysiwyg/files/drawing/54202.pdf, Height=9.85mm, Manufacturer_Part_Number=54202-G08-03, Mouser Price/Stock=https://www.mouser.co.uk/ProductDetail/Amphenol-FCI/54202-G08-03?qs=GN3JspNYOhaVPFh0SDYuCQ%3D%3D
J3: "Connector", Manufacturer_Name="Korean Hroparts Elec", Datasheet Link=https://datasheet.lcsc.com/szlcsc/1903211732_Korean-Hroparts-Elec-TYPE-C-31-M-17_C283540.pdf, Height=3.26mm, Manufacturer_Part_Number=TYPE-C-31-M-17
J4: library part M20-9990546, "Connector", Manufacturer_Name=Harwin, Mouser Part Number=855-M20-9990546, Datasheet Link=http://docs-emea.rs-online.com/webdocs/0da6/0900766b80da602d.pdf, Height=6.1mm, Manufacturer_Part_Number=M20-9990546, Mouser Price/Stock=https://www.mouser.co.uk/ProductDetail/Harwin/M20-9990546?qs=ulE8k0yEMYY8EKyDN9ic6A%3D%3D
Q0: "MOSFET (P-Channel)", Manufacturer_Name="Alpha & Omega Semiconductors", Datasheet Link=https://datasheet.lcsc.com/szlcsc/1910101232_Alpha-Omega-Semicon-AOS-AONR21357_C431196.pdf, Height=0.9mm, Manufacturer_Part_Number=AONR21357
Q1: "MOSFET (N-Channel)", Arrow Part Number=2N7000, Manufacturer_Name="ON Semiconductor", Mouser Part Number=512-2N7000, Arrow Price/Stock=https://www.arrow.com/en/products/2n7000/on-semiconductor, Datasheet Link=http://www.onsemi.com/pub/Collateral/NDS7002A-D.PDF, Manufacturer_Part_Number=2N7000, Mouser Price/Stock=https://www.mouser.co.uk/ProductDetail/ON-Semiconductor/2N7000?qs=FOlmdCx%252BAA2o%2FKZOTk%2F3hg%3D%3D
Q3: "P-Channel 20V 9.4A (Ta) 2.4W (Ta) Surface Mount 6-MicroFET (2x2)", Package=None, Availability=Unavailable, MF="{'manufacturer': u'ON Semiconductor'}", MP=FDMA910PZ, Price=None
R0 R1 R2 R3 R4 R5 R6 R7 R8 R9 R10 R11 R12 R13 R15 R16 R17 R18 R19 R20 R21 R22 R23: library part "Resistor, 0402"
U0: "Linear Voltage Regulator IC 1 Output 2A 6-DFN (3x3)", Package=None, Availability=Unavailable, MF="{'manufacturer': u'STMicroelectronics'}", MP=LD39200PU33R, Price=None
Y0: "Crystal or Oscillator", Manufacturer_Name=NDK, Mouser Part Number=344-NX3225GB16MSTRA2, Datasheet Link=http://www.ndk.com/images/products/catalog/c_NX3225GB-STD-CRA-2_e.pdf, Manufacturer_Part_Number=NX3225GB-16M-STD-CRA-2, Mouser Price/Stock=https://www.mouser.co.uk/ProductDetail/NDK/NX3225GB-16M-STD-CRA-2?qs=w%2Fv1CP2dgqqz6Fo69dRGLg%3D%3D
Z0 Z1: "Zener Diode", Arrow Part Number=BZT52-B5V1J, Manufacturer_Name=Nexperia, Mouser Part Number=771-BZT52-B5V1J, Arrow Price/Stock=https://www.arrow.com/en/products/bzt52-b5v1j/nexperia, Datasheet Link=https://assets.nexperia.com/documents/data-sheet/BZT52-B_SER.pdf, Height=1.3mm, Manufacturer_Part_Number=BZT52-B5V1J, Mouser Price/Stock=https://www.mouser.co.uk/ProductDetail/Nexperia/BZT52-B5V1J/?qs=W0yvOO0ixfGU2vzMfcQu3g%3D%3D

## Via types
v1: diameter 17.72, hole 7.87, Top Layer to Bottom Layer, 92 vias
v2: diameter 17.72/17.72/17.72/17.72 (per signal layer), hole 7.87, Top Layer to Bottom Layer, 10 vias

## Nets (pads, with @x,y where several pads share a name; then routed paths per layer and width w, separated by ;. In a path a pad name is that pad's centre, name@x,y a point inside that pad or via, vN(x,y) a via of type N, cw(c..) or ccw(c..) an arc to the next point about the centre after c; other vN are vias at no path point)
+3.3V: C2.1 C4.1 C5.1 C6.1 C7.1 C11.1 C13.2 C20.2 C23.1 C24.1 C27.1 C29.1 C31.1 IC0.2 IC0.11 IC0.26 IC0.37 IC0.42 IC0.54 IC1.8 IC2.8 IC2.13 IC2.22 IC3.8 J0.4 J1.1 J1.6 R0.2 R1.2 R2.2 R13.2 R16.2 R17.2 R18.2 U0.1 U0.2 U3.1 Z1.1 | length 2316.6
  Top Layer w4: v1(5255,5232.48) IC3.8 ; v1(5345,5064.69) 5345.54,5064.14 5368.57,5064.14 C20.2 ; v1(5365,4710) 5365,4722.72 C29.1 5400.11,4782.4 v1(5400.11,4810.11) 5405,4815 5390,4830 C27.1 ; U3.1 5374.41,5629.41 5405,5660 v1(5415,5660) ; v1(5390,5202.72) C2.1@5400,5192.72 ; v1(5475,5215) C11.1 ; J0.4 5489.13,5050 5515,5050 ; v1(5505,5555) 5507.28,5557.28 C24.1 5540,5557.28 5575,5522.28 J1.1 ; C7.1 v1(5607.28,5422.72) ; v1(5667.28,5635) 5675,5642.72 J1.6 ; C6.1 v1(5735,5415) ; IC1.8@5820,4550 IC1.8 ; C13.2 5837.72,4462.28
  Top Layer w12: 5515,5050 5539.57,5074.57 v1(5539.57,5119.57)
  Top Layer w20: IC1.8@5820,4550 5865,4505 5865,4455 v1(5855,4445)
  Top Layer w25: 5837.72,4462.28 v1(5855,4445)
  Top Layer w30: v1(5960,4335) Z1.1
  Mid Layer 2 w20: v1(5960,4335) v1@5960,4340
  Mid Layer 2 w30: v1(5855,4445) v1@5960,4340
  Bottom Layer w4: IC2.22 5247.87,4792.87 5235,4780 5235,4705 5265,4675 5330,4675 v1(5365,4710) ; R1.2 5340.31,5060 v1(5345,5064.69) ; IC0.37 5345.28,5202.72 v1(5390,5202.72) ; IC0.42 5347.09,5295.15 5372.42,5295.15 5372.57,5295 5399.26,5295 v1(5399.63,5295.37) ; IC2.8 5398.62,4808.62 v1(5400.11,4810.11) 5400.11,4840.43 R18.2 ; v1(5410,4925.31) R2.2 ; v1(5505,5555) 5519.88,5540.12 IC0.54 ; C4.1@5539.57,4985 IC0.26 v1(5539.57,5119.57) ; C31.1 C23.1 v1(5667.28,5635) ; v1@5673.48,5641.2 R16.2 R17.2 ; v1(5735,5415) 5752.52,5397.48 IC0.2 ; R0.2 5740,4749.69 5745,4744.69 v1(5745,4725) ; v1(5745.31,5220.31) IC0.11 5847.4,5220.31 C5.1 ; v1(5890,4955) R13.2
  Bottom Layer w20: v1(5855,4445) 5878.5,4445 5893.5,4430 5893.5,4412.6
+5V: C19.1 D0.2 J3.A9 J3.B9 Q3.1 R3.1 U4.4 | length 1984.8
  Top Layer w20: 5875,4545 5875,4695 5825,4745 5825,4810 5845,4830 5940,4830 6015,4905 v1(6015,5080) 6015,5380 ; 5891.89,5606.89 5905,5593.78
  Top Layer w25: 5875,4545 5918.23,4501.77 Q3.1 ; 5905,5490 6015,5380
  Top Layer w35: J3.B9 5890,5606.89 ; 5891.89,5606.89 5961.57,5676.57 v1(5961.57,5726.57)
  Top Layer w40: J3.A9 v1(5961.57,5726.57) ; 5905,5490 5905,5593.78
  Bottom Layer w4: R3.1 5952.76,5679.37 D0.2 D0.2@5991.61,5756.61
  Bottom Layer w20: C19.1 6045.12,5107.6 U4.4 6032.72,5080 v1(6015,5080)
  Bottom Layer w40: v1(5961.57,5726.57) D0.2@5991.61,5756.61
"Amplifier IN": C25.2 J1.8 | length 88.7
  Top Layer w4: v1(5545,5680) 5571.65,5680 J1.8
  Bottom Layer w4: C25.2 v1(5545,5680)
"Bat VDD": C15.2 C16.1 C17.2 C18.2 R7.2 U1.3 U1.6 U1.9 U1.12 | length 848.8
  Top Layer w8: v1(5360,4505) 5435,4430 v1(5435,4385) 5493.24,4443.24 5551.55,4443.24 5574.79,4420 v1(5645,4420) 5700,4365 v1(5745,4365)
  Bottom Layer w8: v1(5360,4505) 5362.72,4505 C15.2 5452.44,4457.72 U1.6 ; C16.1 5417.28,4385 v1(5435,4385) ; U1.12 5657.91,4340.2 C18.2 ; U1.9 5640,4415 v1(5645,4420) ; R7.2 5735.31,4365 v1(5745,4365)
  Bottom Layer w20: C18.2 5672.28,4330 R7.2
Bat+: P0.1 Q0.1 Q0.2 Q0.3 R6.2 R7.1 R10.2 U4.3 | length 2069.3
  Top Layer w4: P0.1@5954.69,4090.31 R10.2
  Top Layer w8: R6.2 5470,4145 v1(5605,4280)
  Top Layer w65: P0.1@5954.69,4090.31 P0.1
  Bottom Layer w4: P0.1 P0.1@5990,4125
  Bottom Layer w8: v1(5605,4280) 5714.37,4280 5739.69,4305.31 R7.1 5810,4330 5869.29,4270.71
  Bottom Layer w25: Q0.3 Q0.2
  Bottom Layer w40: U4.3 5936.47,5090.81 5966.48,5090.81 5980.54,5076.75 5980.54,4995.85 5960,4975.31 5960,4949.72 5965.28,4944.44
  Bottom Layer w45: Q0.1 Q0.2 5887.2,4227.8
  Bottom Layer w50: Q0.1 5869.29,4270.71 5869.29,4295.71 5810,4355 5810,4465 5880,4535 6015,4535 6050,4570 6050,4838.63 5964.5,4924.13 5964.5,4944.44
  Bottom Layer w65: 5887.2,4227.8 P0.1@5990,4125
Bat-: C14.2 C15.1 C16.2 C17.1 C18.1 P1.1 U1.1 U1.2 U1.4 U1.5 U1.7 U1.8 U1.10 U1.11 U2.2 U2.3 U2.4 U2.5 U2.EPAD | length 2098.6
  Mid Layer 2 w40: P1.1 5310,4170
  Mid Layer 2 w60: 5448.89,4500 5655,4500 5688.86,4466.14 v1@5688.86,4436.14
  Mid Layer 2 w100: 5310,4361.11 5448.89,4500
  Mid Layer 2 w150: 5310,4170 5370,4230 U2.EPAD
  Mid Layer 2 w180: 5310,4170 5310,4361.11
  Bottom Layer w4: U2.EPAD U2.EPAD@5447.72,4222.28
  Bottom Layer w20: C14.2 U2.EPAD@5447.72,4222.28 ; U1.11 U1.10
  Bottom Layer w25: U1.10 C18.1@5652.24,4385.47
  Bottom Layer w30: U1.1@5452.91,4342.28 U1.1 U1.2@5455,4359.58
  Bottom Layer w35: 5360,4276.54 U2.4 ; v1@5381.92,4430 5388.5,4423.42 5431.5,4423.42 5438.08,4430 5440,4430 U1.4 ; 5410,4272.83 C16.2 U1.1@5452.91,4342.28
  Bottom Layer w40: 5612.48,4445.89 U1.7 ; C18.1@5660,4379.08 5676.13,4379.08 5696.6,4399.55 5696.6,4445.02 5676.62,4465 5675,4465
  Bottom Layer w50: U2.3 U2.4 ; U1.7 5617.2,4465 5675,4465
  Bottom Layer w55: P1.1 5310,4190 v1(5330,4210) 5350,4230 U2.3 U2.EPAD 5440,4325.2 5449.74,4334.94 U1.1@5449.74,4340.2
  Bottom Layer w65: 5360,4276.54 5360,4430
  other v1: 5345,4275 5345,4395 5375,4435 5688.38,4435
"Button N/O A": J2.5 Q0.4 R9.2 R10.1 | length 850.6
  Top Layer w4: J2.5 5770,4735.63 5770,4550 v1(5800,4520) ; v1(5879.68,4150) 5904.69,4175 R10.1
  Mid Layer 2 w4: v1(5800,4520) 5790,4510 5790,4297.43 5795.86,4291.57 5795.86,4233.83 v1(5879.68,4150)
  Bottom Layer w4: Q0.4 5869.29,4160.39 v1(5879.68,4150)
"Button N/O B": IC0.9 J2.4 R11.2 | length 606
  Mid Layer 2 w4: v1(5725.31,5259.69) 5725.31,5140.31 5725,5140 5813,5052 5813,4997 v1(5860,4950)
  Bottom Layer w4: v1(5725.31,5259.69) IC0.9 ; J2.4 5847.8,4924.69 R11.2 v1(5860,4950)
"Charge Bias": IC0.10 R12.2 | length 271.3
  Bottom Layer w4: IC0.10 5861.6,5240 5884.22,5217.38 5884.22,5078.91 R12.2
"CS DAC": IC0.59 J1.2 | length 124
  Top Layer w4: J1.2 v1(5625,5550)
  Bottom Layer w4: IC0.59 5618.31,5543.31 v1(5625,5550)
"CS SD": IC0.20 J0.2 | length 293.1
  Top Layer w4: J0.2 5500.16,5130.16 5540,5170 5615.35,5170 v1(5657.68,5127.68)
  Bottom Layer w4: IC0.20 v1(5657.68,5127.68)
ESP_EN: IC0.31 R20.1 | length 414.5
  Mid Layer 2 w4: v1(5550,4895) 5550,4800 5580.31,4769.69 v1(5615.31,4769.69)
  Bottom Layer w4: IC0.31 5445.84,5043.62 5445.84,4964.16 5515,4895 v1(5550,4895) ; R20.1 v1(5615.31,4769.69)
ESP_IO0: IC0.18 IC1.3 | length 378.2
  Bottom Layer w4: IC0.18 5697.05,5007.95 5708.56,4996.44 5708.56,4816.73 5708.41,4816.58 5708.41,4809.96 5720,4798.37 IC1.3
ESP_IO2: IC0.30 IC1.2 | length 472.6
  Mid Layer 2 w4: v1(5545,4920) 5530,4905 5530,4808.69 5620,4718.69 IC1.2
  Bottom Layer w4: IC0.30 5460.83,4960.49 5501.31,4920 v1(5545,4920)
ESP_RST: IC0.14 IC1.7 | length 712.5
  Mid Layer 2 w4: IC1.7 5745,4575 5772,4602 5772,4758.31 5797,4783.31 5797,5044.11 5746.11,5095 v1(5735,5095)
  Bottom Layer w4: v1(5735,5095) 5735,5140 5756.26,5161.26 IC0.14
ESP_RX: IC0.15 IC1.4 | length 552.9
  Mid Layer 2 w4: IC1.4 5789,4706 5789,4752.69 5813,4776.69 5813,4948 v1(5825,4960)
  Bottom Layer w4: IC0.15@5771.26,5141.57 IC0.15 5796.57,5140 5825,5140 5832,5133 5832,4967 v1(5825,4960)
ESP_TX: IC0.16 IC1.5 | length 820.1
  Mid Layer 2 w4: IC1.5 5558.78,4536.22 5651.22,4536.22 5675,4560 5675,4595 5700,4620 5750,4620 5764,4634 5764,4761.63 5789,4786.63 5789,4971 v1(5775,4985)
  Bottom Layer w4: v1(5775,4985) IC0.16@5775,5116.89
GND: C0.2 C1.1 C2.2 C3.2 C4.2 C5.2 C6.2 C7.2 C8.1 C9.1 C10.1 C11.2 C12.1 C13.1 C19.2 C20.1 C23.2 C24.2 C26.2 C27.2 C28.2 C29.2 C30.2 C31.2 IC0.3 IC0.12 IC0.27 IC0.34 IC0.35 IC0.39 IC0.55 IC1.1 IC2.9 IC2.11 IC2.18 IC2.20 IC2.25 IC3.4 J0.6 J0.G1 J0.G2 J0.G3 J0.G4 J1.5 J1.7 J2.6 J3.A12 J3.B12 J3.MH1 J3.MH2 J3.MH3 J3.MH4 J4.5 P2.- Q1.2 R3.2 R5.2 R8.1 R11.1 R15.2 R22.2 R23.1 SW0.1 SW0.2 SW0.4 U0.3 U0.7 U1.EPAD U2.6 U2.7 U2.8 U2.9 U2.10 U3.7 U4.2 Z0.2 Z1.2 | length 1095.3
  Top Layer w20: J0.6 5541.93,4956.93 5567,4982 v1(5615,4982)
  Bottom Layer w4: IC2.20 5293.88,4761.38 IC2.25@5295.5,4763 ; IC2.18 5280.63,4745.63 5295.5,4760.5 IC2.25@5295.5,4763 ; IC2.11 5346.12,4761.38 5322.5,4785 IC2.25 ; IC2.9 5327.87,4792.87 IC2.25 ; C4.2 5497.48,4980 5508.08,4990.6 5508.08,4990.8 5519.88,5002.6 IC0.27 ; C9.1 5539.57,5582.72 IC0.55 ; IC0.12 5831.65,5200.63 C5.2 v2(5865,5135) ; IC2.25@5295.5,4763 5317.5,4785 IC2.25
  Bottom Layer w20: P2.-@5493.15,4084.06 P2.-@5522.2,4055
  Bottom Layer w40: U1.EPAD@5525,4391.5 U1.EPAD@5533.74,4380.24
  Bottom Layer w105: P2.- 5522.2,4055 5533.74,4066.53 5533.74,4252.42 5533.64,4252.51 5533.64,4300.04 5533.74,4300.14 U1.EPAD@5533.74,4380.24
  other v1: 5320,4695.86 5585,5135 5245,5265
  other v2: 6060,4150 5290,4515 5455,4720 5525,5280 5580,5280 5920,5310 6025,5670 5275,5815
"LED B": IC0.57 IC3.6 | length 439.7
  Top Layer w4: IC3.6 5304.84,5239.84 5459.81,5394.81 5549.81,5394.81 v1(5571.11,5416.12)
  Bottom Layer w4: v1(5571.11,5416.12) 5571.11,5417.49 5578.94,5425.32 IC0.57
"LED G": IC0.60 IC3.3 | length 609.9
  Top Layer w4: v1(5285,5160) 5295,5160 5304.84,5150.16 IC3.3
  Mid Layer 2 w4: v1(5285,5160) 5286.69,5160 5494.99,5368.3 v1(5582.31,5368.3)
  Bottom Layer w4: v1(5582.31,5368.3) 5637.99,5423.98 IC0.60
"LED R": IC0.61 IC3.1 | length 614.8
  Top Layer w4: IC3.1 5265.47,5115.47 v1(5285,5135)
  Mid Layer 2 w4: v1(5285,5135) 5287.62,5137.62 5293.6,5137.62 5496.53,5340.56 v1(5582.51,5340.56)
  Bottom Layer w4: v1(5582.51,5340.56) 5584.22,5340.56 5657.68,5414.02 IC0.61
MISO: IC0.21 J0.7 R18.1 | length 484.1
  Top Layer w4: v1(5453.62,4913.62) J0.7
  Bottom Layer w4: v1(5453.62,4913.62) 5452.24,4915 5431.93,4894.69 R18.1 5433.24,4876.44 5616.44,4876.44 5641.44,4901.44 5641.44,4923.9 5665,4947.46 5665,4992.87 5637.99,5019.88 IC0.21
MOSI: IC0.22 J0.3 J1.4 R17.1 | length 857.1
  Top Layer w4: J0.3 5496.85,5086.85 5523.71,5113.71 5523.71,5138.71 5545,5160 5605,5160 5616.85,5148.15 v1(5616.85,5096.85) ; J1.4 v1(5755,5513.35)
  Bottom Layer w4: v1(5616.85,5096.85) v1@5618.31,5088.31 ; IC0.22 v1@5618.31,5088.31 ; v1@5620,5090 v1@5618.31,5088.31 ; R17.1 v1(5755,5513.35) 5755,5460 5618.31,5323.31 v1@5618.31,5088.31
"Neopixel Data": IC0.28 R21.2 | length 1384.2
  Mid Layer 2 w4: v1(5560,5190) 5662.43,5190 5805,5047.43 5805,4780 5780,4755 5780,4377.57 5751.57,4349.14 5725.05,4349.14 5625.91,4250 v1(5625.31,4250)
  Bottom Layer w4: IC0.28 5500.2,5130.2 v1(5560,5190) ; v1(5625.31,4250) R21.2
NetC0_1: C0.1 IC0.41 Y0.1 | length 577
  Top Layer w4: C0.1 5342.28,4917.72 v1(5345,4915)
  Bottom Layer w4: IC0.41 5343.42,5279.14 5406.57,5279.14 5406.8,5279.37 5446.31,5279.37 5498.86,5226.83 5498.86,5168.86 5367,5037 5362.4,5037 Y0.1 5345,4967.6 v1(5345,4915)
NetC1_2: C1.2 IC0.40 Y0.2 | length 610
  Top Layer w4: C1.2 5297.72,4917.28 v1(5300,4915)
  Bottom Layer w4: v1(5300,4915) 5300,4972.6 Y0.2 5287.6,5017.6 5315,5045 5363.69,5045 5490.86,5172.17 5490.86,5223.51 5454.69,5259.69 IC0.40
NetC12_2: C12.2 D0.1 Q3.3 U0.5 U0.6 | length 1259.7
  Top Layer w4: 6042.72,4445 6060,4427.72 C12.2
  Top Layer w45: C12.2@6060,4427.72 v1(6060,5545)
  Top Layer w80: Q3.3@6020,4445 6042.72,4445
  Bottom Layer w4: v1(6060,5545) v1@6060,5553.39
  Bottom Layer w40: U0.6 U0.5
  Bottom Layer w60: D0.1 v1@6060,5553.39
  other v1: 6020,4425
NetC14_1: C14.1 R6.1 U2.1 | length 89.4
  Top Layer w8: v1(5415,4130) 5420,4135 R6.1
  Bottom Layer w8: U2.1 5386.85,4190.43 C14.1 5415,4162.28 v1(5415,4130)
NetC25_1: C25.1 R19.1 | length 67.4
  Bottom Layer w4: R19.1 5385.31,5680 C25.1
NetC26_1: C26.1 U3.2 | length 107.7
  Top Layer w4: U3.2 5400,5615 v1(5410,5625)
  Bottom Layer w4: v1(5410,5625) 5437.28,5625 C26.1
NetC28_1: C28.1 IC2.10 | length 57.1
  Bottom Layer w4: IC2.10 5415.16,4777.13 C28.1
NetIC0_32: IC0.32 R2.1 | length 62.5
  Bottom Layer w4: IC0.32 5421.46,4993.23 R2.1
NetIC0_33: IC0.33 R1.1 | length 27.5
  Bottom Layer w4: IC0.33 5344.69,5120.39 R1.1
NetIC1_6: IC1.6 R20.2 | length 187.8
  Bottom Layer w4: IC1.6 5658.78,4613.78 5658.78,4740.91 R20.2
NetIC3_2: IC3.2 J2.1 | length 408.2
  Top Layer w4: v1(5285.16,5065.16) IC3.2
  Mid Layer 2 w4: v1(5285.16,5065.16) 5409.14,4941.17 5565.09,4941.17 J2.1
NetIC3_5: IC3.5 J2.3 | length 660.1
  Top Layer w4: IC3.5 5324.53,5171.79 v1(5395,5101.31)
  Mid Layer 2 w4: v1(5395,5101.31) 5395,4977.94 5415.77,4957.17 5706.57,4957.17 J2.3
NetIC3_7: IC3.7 J2.2 | length 604.3
  Top Layer w4: IC3.7 5285.16,5199.84 5375,5110 v1(5375,5080)
  Mid Layer 2 w4: v1(5375,5080) 5375,4986.63 5412.46,4949.17 5635.83,4949.17 J2.2
NetJ3_A5: J3.A5 R22.1 | length 20.3
  Bottom Layer w4: v1(5855,5640) R22.1
NetJ3_B5: J3.B5 R23.2 | length 53
  Top Layer w4: J3.B5 5833.58,5690 v1(5860.31,5690)
  Bottom Layer w4: v1(5860.31,5690) R23.2
NetP2_D: P2.D R21.1 | length 88.2
  Bottom Layer w20: P2.D 5679.69,4174.69 R21.1
NetQ1_D: Q1.3 R9.1 | length 100.2
  Top Layer w8: R9.1 5915.32,4240 v1(5950,4240)
  Bottom Layer w8: Q1.3 5938.66,4251.34 v1(5950,4240)
NetR15_1: R15.1 U4.5 | length 57.8
  Bottom Layer w20: R15.1 6045.12,4960.43 U4.5
NetR19_2: R19.2 U3.4 | length 151.5
  Top Layer w4: U3.4 5470,5588.74 v1(5470,5605)
  Bottom Layer w4: R19.2 5385,5625 5405,5605 v1(5470,5605)
NetS0_+: S0.+ U3.5 | length 107
  Top Layer w20: U3.5 5468.11,5756.93
  Top Layer w45: 5468.11,5756.93 S0.+
NetS0_-: S0.- U3.8 | length 110.1
  Top Layer w20: 5350,5764.41 U3.8
  Top Layer w50: 5350,5764.41 S0.-
"Power ON": IC0.17 Q1.1 R8.2 | length 1133
  Top Layer w4: v1(5690,5110) 5740,5060 5770,5060 5800,5030 5800,4895 v1(5835,4860)
  Mid Layer 2 w4: v1(5835,4860) 5870,4825 5870,4459.7 5981,4348.7 5981,4321.68 v1(6021.34,4281.34)
  Bottom Layer w4: v1(5690,5110) 5690,5105 5716.73,5078.27 IC0.17 ; v1(6021.34,4281.34) Q1.1
  Bottom Layer w20: Q1.1 6039.06,4284.69 R8.2
SCK: IC0.19 J0.5 J1.3 R16.1 | length 914.3
  Top Layer w4: J0.5 5492.44,5010 5665,5010 v1(5690,4985) ; J1.3 5675,5545.63 v1(5684.69,5555.31)
  Mid Layer 2 w4: v1(5684.69,5200.31) v1(5684.69,5555.31)
  Bottom Layer w4: v1(5684.69,5200.31) 5674.14,5189.77 5674.14,5046.84 IC0.19 5677.36,5007.64 5690,4995 v1(5690,4985) ; v1(5684.69,5555.31) R16.1
SCL: IC0.23 IC2.23 | length 651.4
  Top Layer w4: v1(5380,4905) 5374.14,4899.14 5409.14,4899.14 5425.86,4915.86 5425.86,5005.86 5443.76,5023.76 5518.76,5023.76 5590,5095 v1(5590,5100)
  Bottom Layer w4: IC2.23 5246.38,4808.62 5235,4820 5235,4850 5284.14,4899.14 5306.57,4899.14 5318.29,4899.14 5374.14,4899.14 v1(5380,4905) ; v1(5590,5100) 5598.62,5091.38 IC0.23
SDA: IC0.24 IC2.24 | length 581.1
  Top Layer w4: v1@5317.34,4882.34 v1(5317.34,4883.28) 5322.06,4888 5409.31,4888 5435,4913.69 5435,4920 5450.86,4935.86 5560.86,4935.86 5575,4950 5610,4950 v1(5645,4985)
  Bottom Layer w4: IC2.24 5260.94,4857.51 5286.72,4883.28 v1(5317.34,4883.28) ; IC0.24 5578.94,5016.06 5595,5000 5621.6,5000 5636.6,4985 v1(5645,4985)
TCK: IC0.52 J4.4 | length 281.1
  Bottom Layer w4: J4.4 5352,5548 5453.31,5548 5480.51,5520.8 IC0.52
TDI: IC0.50 J4.2 | length 302.9
  Top Layer w4: J4.2 5310,5390 v1(5395,5390)
  Bottom Layer w4: v1(5395,5390) 5407.57,5390 5418.43,5379.14 5431.57,5379.14 5441.14,5388.71 IC0.50
TDO: IC0.49 J4.1 | length 283.8
  Top Layer w4: J4.1 5360,5330 v1(5425,5395)
  Bottom Layer w4: IC0.49 5421.46,5398.54 v1(5425,5395)
TMS: IC0.51 J4.3 | length 233.2
  Bottom Layer w4: J4.3 5280,5540 5450,5540 5460,5530 5460,5496.26 IC0.51
VBAT: C30.1 P2.+ Q0.5 Q0.6 Q0.7 Q0.8 Q0.9 Q0.10 Q0.11 Q3.2 R4.1 U3.6 Z0.1 | length 3113.1
  Top Layer w4: v1(5365,4580) 5420,4635 5420,4825 5385,4860 R4.1
  Top Layer w20: U3.6@5427.73,5765 5427.73,5777.73 v1(5430,5780)
  Top Layer w40: v1(5365,4580) 5445,4500 5710,4500 5852.5,4357.5 ; C30.1@5595.06,4334.98 C30.1@5634.98,4334.98
  Top Layer w70: v1(5780,4285) 5780,4310
  Top Layer w80: C30.1@5634.98,4334.98 5659.96,4310 5780,4310 ; v1(5780,4285) 5852.5,4357.5 5902.6,4407.6 Q3.2
  Mid Layer 2 w20: v1@5425,5785 v1(5430,5780)
  Mid Layer 2 w40: v1(5365,4580) 5250,4695 5250,5173.74 5360,5283.74 5360,5760 5385,5785 v1@5425,5785
  Bottom Layer w40: Q0.9 5761.61,4176.61 Q0.5 Q0.6 Q0.7 Q0.8 5780,4253.39 5796.85,4253.39 Q0.10
  Bottom Layer w50: Q0.9@5780,4253.39 v1(5780,4285)
  Bottom Layer w80: 5790,4166.61 5800,4176.61 Q0.9
  Bottom Layer w120: 5790,4166.61 5790,4062.8 5797.8,4055 P2.+
VDDC: C3.1 C8.2 C9.2 C10.2 IC0.25 IC0.56 | length 708.2
  Top Layer w4: C10.2 C8.2 5532.72,5445 v1(5540,5445)
  Bottom Layer w4: C9.2 5559.25,5581.54 IC0.56 5559.25,5459.25 5545,5445 v1(5540,5445) 5550,5435 5550,5240 5580,5210 5580,5175 5559.25,5154.25 IC0.25 5559.25,4993.03 C3.1
Vsense: IC0.8 R4.2 R5.1 | length 934.1
  Top Layer w4: R5.1 R4.2 5355.31,4880 5400,4880 5430,4850 5530,4850 5550,4870 5690,4870 5710,4890 5710,4965 v1(5730.86,4985.86)
  Bottom Layer w4: v1(5730.86,4985.86) 5730.86,5079.14 5728.43,5079.14 5719.14,5088.43 5719.14,5090.86 5709.46,5100.54 5709.46,5266.25 5722.57,5279.37 IC0.8
~Charging: IC0.13 R12.1 R13.1 U4.1 | length 284.1
  Bottom Layer w4: IC0.13@5795.94,5180 IC0.13 5818.74,5180.94 5840,5159.69 5840,5035.32 R12.1
  Bottom Layer w8: R12.1 5860.63,5014.69 R13.1 5892.91,5017.6 U4.1
~RST: IC0.38 R0.1 SW0.3 | length 965.5
  Top Layer w4: v1(5900,4725) 5915.43,4725 SW0.3
  Mid Layer 2 w4: v1(5419.26,5125.74) 5579.83,4965.17 5729.83,4965.17 v1(5735,4960)
  Bottom Layer w4: IC0.38 5398.2,5220.31 5419.26,5199.26 v1(5419.26,5125.74) ; v1(5735,4960) 5725,4960 5716.56,4951.56 5716.56,4813.42 5716.41,4813.27 R0.1 5875,4750 v1(5900,4725)
pads on no net: IC0.1 IC0.4 IC0.5 IC0.6 IC0.7 IC0.29 IC0.36 IC0.43 IC0.44 IC0.45 IC0.46 IC0.47 IC0.48 IC0.53 IC0.58 IC0.62 IC0.63 IC0.64 IC2.1 IC2.2 IC2.3 IC2.4 IC2.5 IC2.6 IC2.7 IC2.12 IC2.14 IC2.15 IC2.16 IC2.17 IC2.19 IC2.21 J0.1 J0.8 J0.CD1 J0.MH1 J0.MH2 SW0. U0.4 U3.3
copper on no net:
  other v1: 5755,5035
  other v2: 5935,4640

## Polygon pours and split planes (outlines as drawn)
GND on Mid Layer 1 "Top Layer-No Net" (solid, remove dead copper, pour order 8): 5200.25,3945.25 5200.25,5890.63 6099.08,5890.63 6099.08,3945.25
GND on Top Layer "Top Layer-No Net1" (solid, remove dead copper, pour order 9): 5200.25,3945.25 5200.25,5890.63 6099.08,5890.63 6099.08,3945.25
GND on Bottom Layer "Top Layer-No Net3" (solid, remove dead copper, pour order 11): 5200.25,3945.25 5200.25,5890.63 6099.08,5890.63 6099.08,3945.25
+3.3V on Mid Layer 2 "Top Layer-No Net2" (solid, remove dead copper, pour order 10): 5200.25,3945.25 5200.25,5890.63 6099.08,5890.63 6099.08,3945.25

## Other copper
Top Layer:
  pour cut-out: 5651.16,5766.61 cw(c5651.16,5811.89) 5605.89,5811.89 cw(c5651.16,5811.89) 5651.16,5857.16 cw(c5651.16,5811.89) 5696.44,5811.89 cw(c5651.16,5811.89)

## Silkscreen, mask and mechanical layers (free items; w line width, h text height)
Mechanical 1:
  circle w0.5: c5651.16,5811.89 r45.28
  circle w0.5: c5651.16,4023.99 r45.28
  lines w0.5: 6099.08,5890.63 5200.25,5890.63 5200.25,3945.25 6099.08,3945.25 6099.08,4204.42 6139.72,4204.42 ccw(c6505.45,4374.96) 6458.72,3974.13 cw(c6505.45,3958.7) 6552.18,3974.13 ccw(c6505.45,4374.96) 6552.18,4775.79 cw(c6505.45,4791.22) 6458.72,4775.79 ccw(c6505.45,4374.96) 6139.72,4545.51 6099.17,4545.51 6099.17,5275.91 6135.87,5275.91 ccw(c6468.6,5431.06) 6135.87,5586.22 6099.17,5586.22 6099.23,5890.63

## Panel: embedded boards
"..\Blade PCB\Blade-Side PCB.PcbDoc" at 6101.46,5063.94, 1 rows x 1 columns, spacing 2500 x 1500, rotation 0
"..\Hilt PCB\Hilt-Side PCB.PcbDoc" at 6101.9,3974.09, 1 rows x 1 columns, spacing 2500 x 1500, rotation 0

## Text inside footprints (layer, text, board x,y; h text height)
P2: Top Overlay "+" at 5783.29,4137.26 h60 r180; Top Overlay "-" at 5575.39,4136.12 h60 r180; Top Overlay "D" at 5630,4220 h80
S0: Top Overlay "+" at 5520,5810 h60; Top Overlay "-" at 5255,5810 h60